# Allegro board isl9237eval1Zb.brd
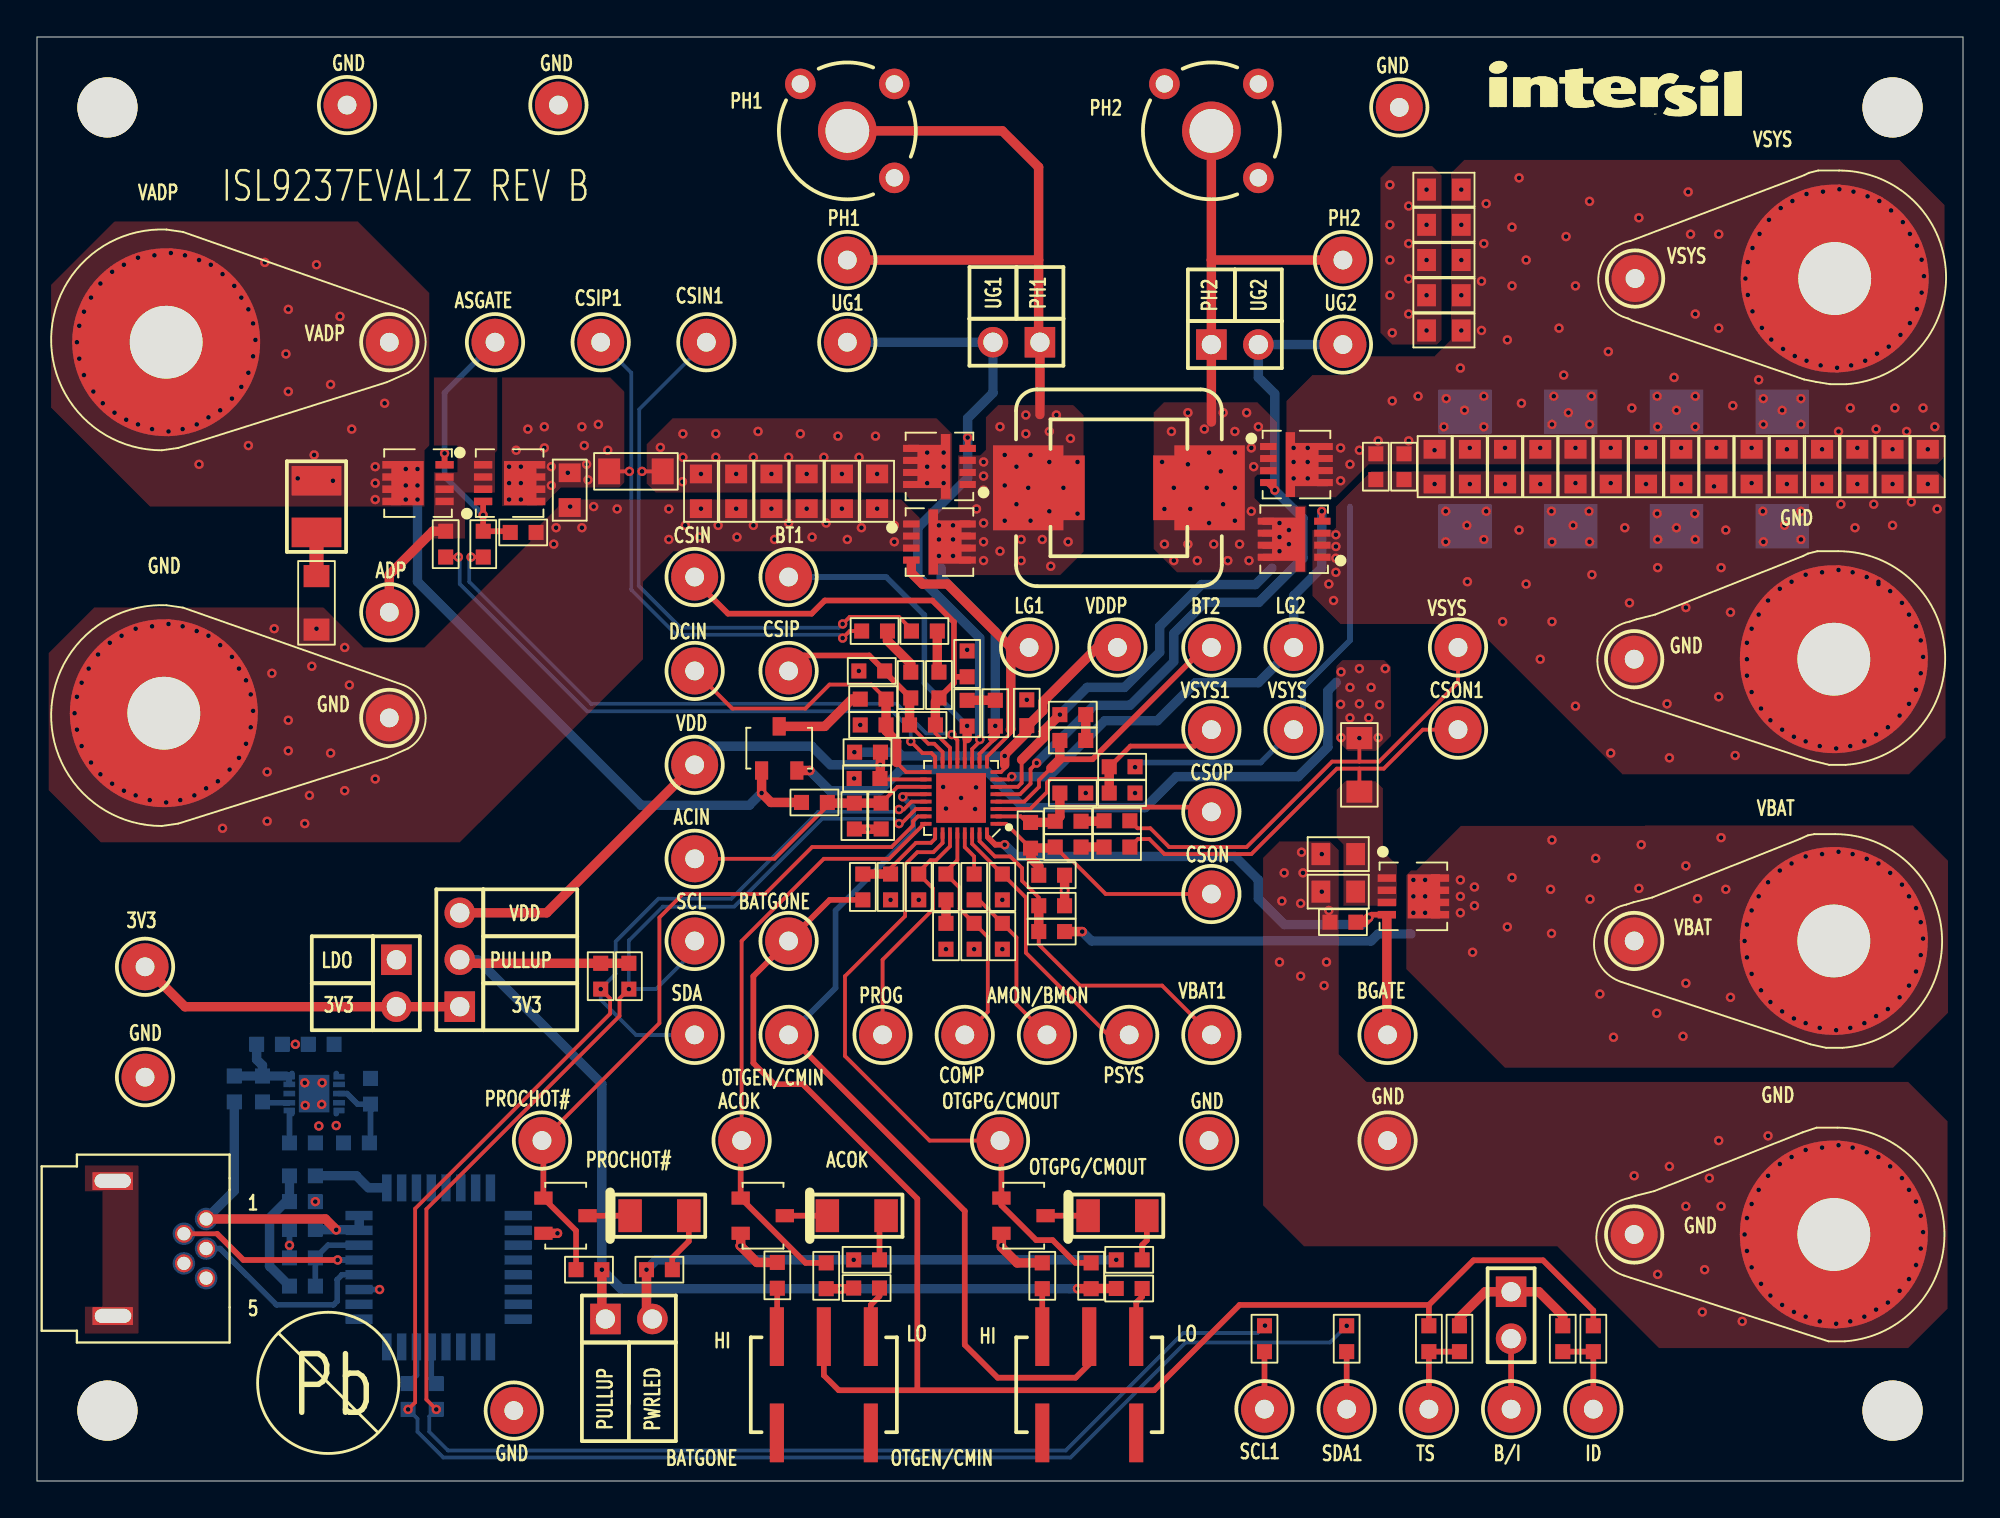
[diagram p0: board, top side]
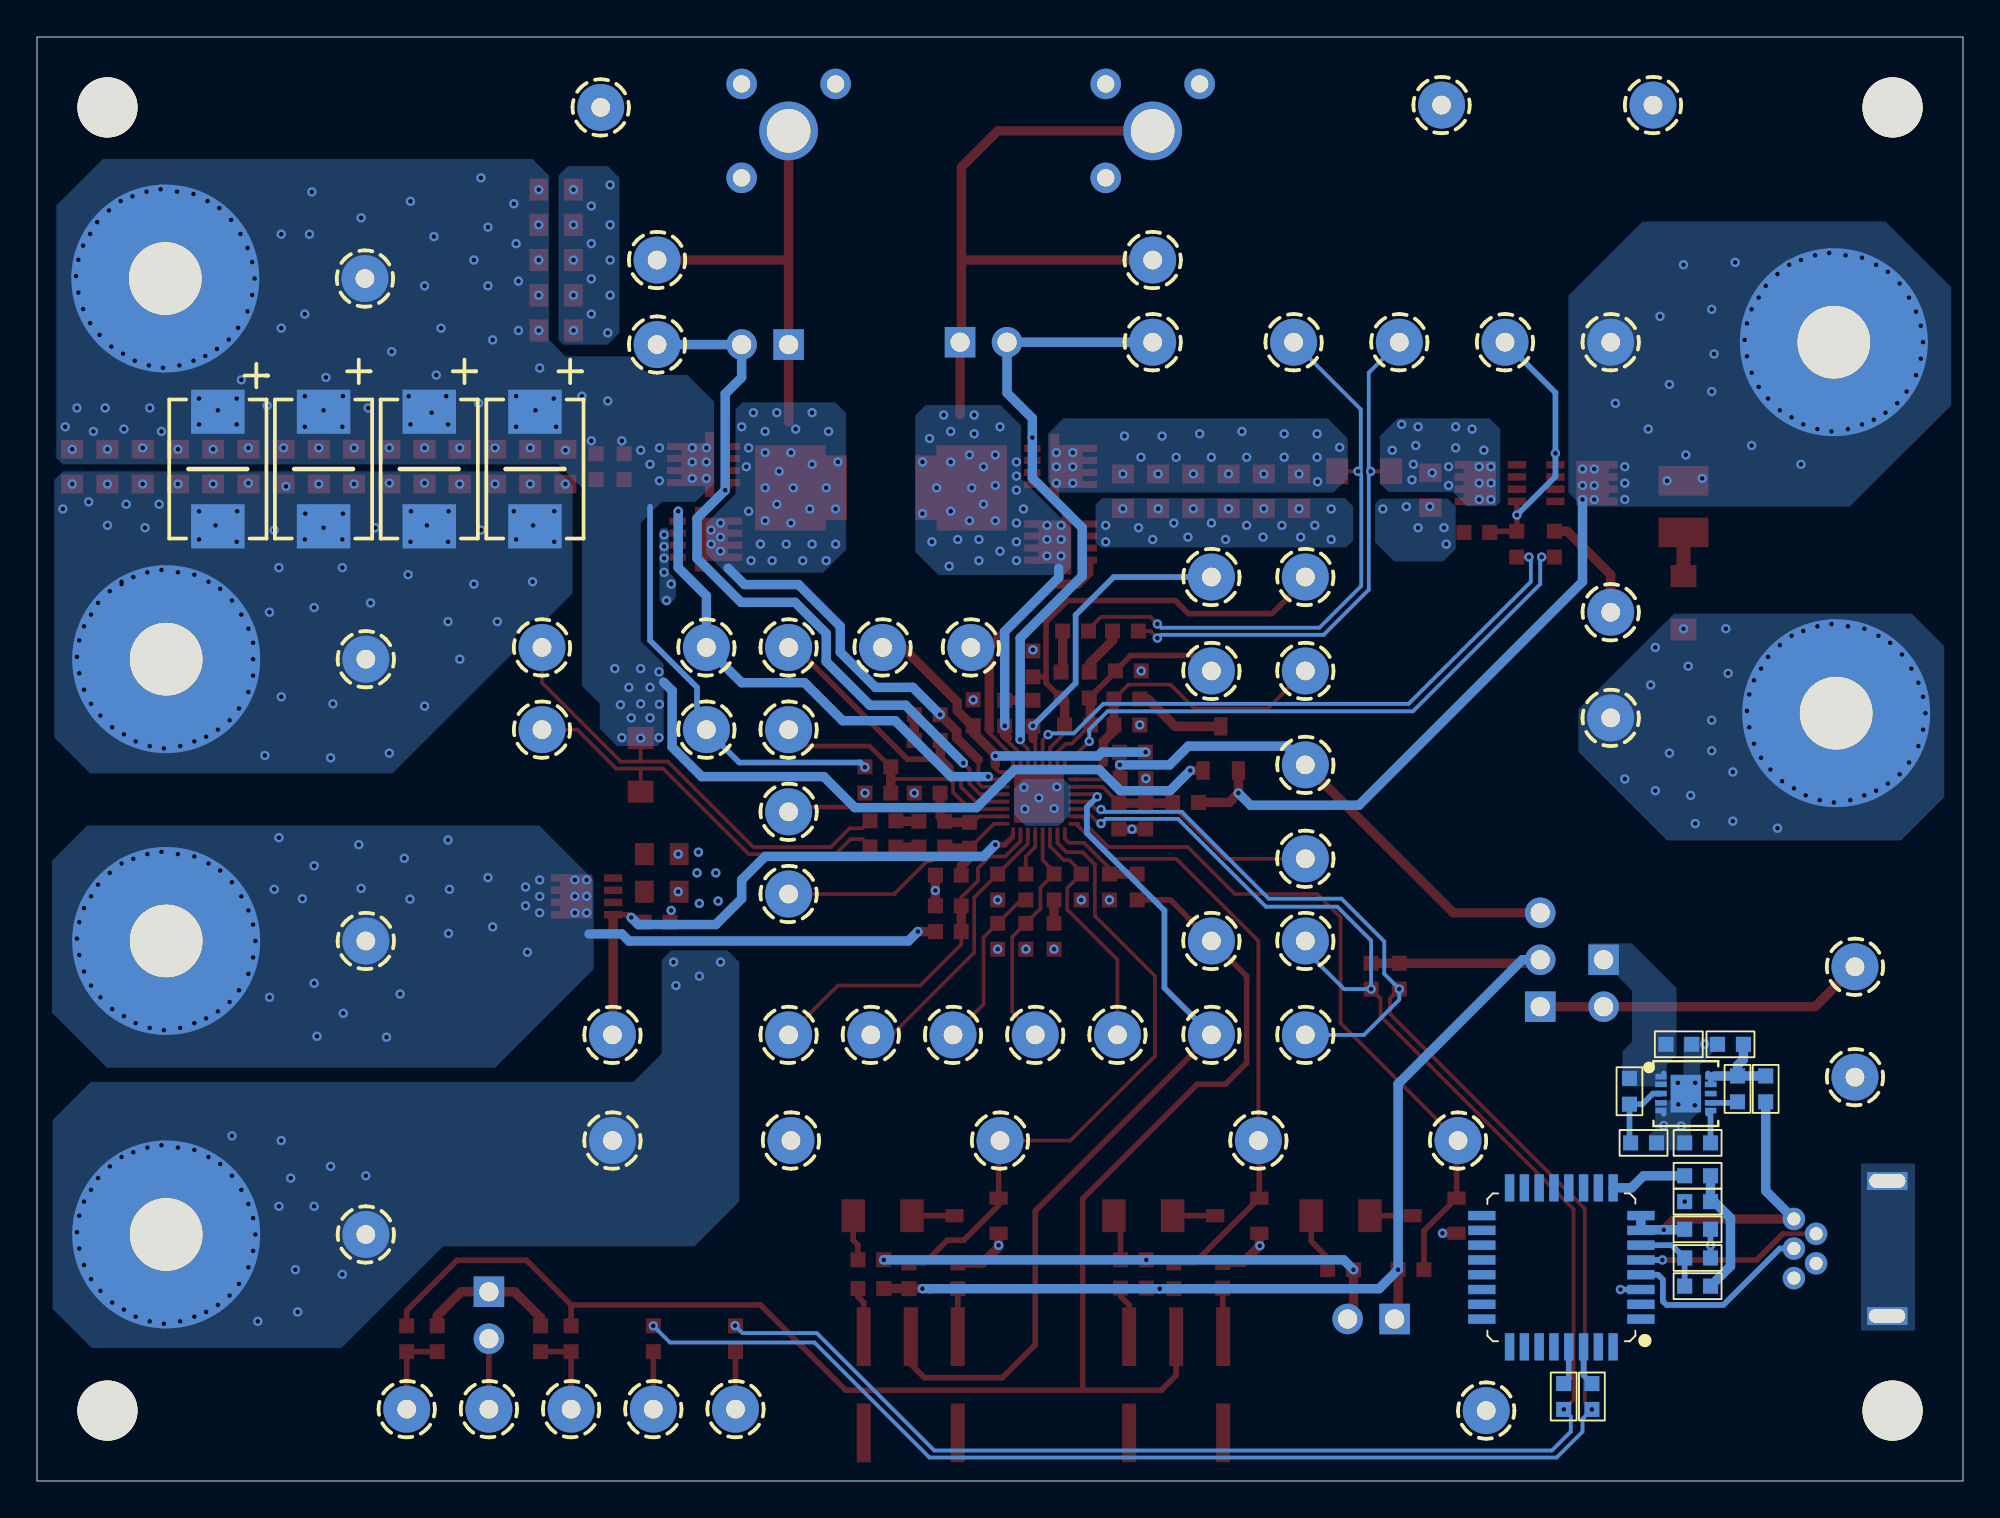
[diagram p1: board, bottom side, seen from below]

Outline 104.14 x 78.1 mm; copper layers: TOP, L2, L3, BOTTOM. Coordinates in mm from the lower left corner of the outline.
Outline path: 0,78.1 0,0 104.14,0 104.14,78.1 0,78.1 ; 3.44,15.88 arc(3.13,16.25) 3.46,16.59 4.72,16.59 arc(5.05,16.2) 4.64,15.88 3.44,15.88 ; 3.46,8.58 arc(3.15,8.94) 3.49,9.29 4.75,9.29 arc(5.08,8.89) 4.67,8.58 3.46,8.58

## Design rules (mm)
nets with their own width: min track width 0.152; nets DCIN VBAT VSYS

## Placement (name value [footprint] x y rotation side)
C1  NC  [CAP_SANYO_D2]  94.36 54.74 270 bottom
C2  NC  [CAP_SANYO_D2]  88.65 54.74 270 bottom
C3  NC  [CAP_SANYO_D2]  82.93 54.74 270 bottom
C4  NC  [CAP_SANYO_D2]  77.22 54.74 270 bottom
C5  1uF  [SM0603_DELTA]  72.39 54.86 90 top
C6  1uF  [SM0603_DELTA]  73.91 54.86 90 top
C7  10uF  [SM0805_DELTA]  75.57 54.86 90 top
C8  10uF  [SM0805_DELTA]  77.47 54.86 90 top
C9  10uF  [SM0805_DELTA]  79.38 54.86 90 top
C10  10uF  [SM0805_DELTA]  81.28 54.86 90 top
C11  10uF  [SM0805_DELTA]  83.19 54.86 90 top
C12  10uF  [SM0805_DELTA]  85.09 54.86 90 top
C13  10uF  [SM0805_DELTA]  87 54.86 90 top
C14  10uF  [SM0805_DELTA]  88.9 54.86 90 top
C15  10uF  [SM0805_DELTA]  90.8 54.86 90 top
C16  10uF  [SM0805_DELTA]  92.71 54.86 90 top
C18  NC  [SM0805_DELTA]  28.8 53.59 90 top
C19  NC  [SM0805_DELTA]  45.43 53.53 90 top
C20  NC  [SM0805_DELTA]  43.52 53.53 90 top
C21  10uF  [SM0805_DELTA]  41.62 53.53 90 top
C22  10uF  [SM0805_DELTA]  39.71 53.53 90 top
C23  10uF  [SM0805_DELTA]  37.81 53.53 90 top
C24  10uF  [SM0805_DELTA]  35.9 53.53 90 top
C25  NC  [SM0603_DELTA]  26.29 51.31 180 top
C26  0.1uF  [SM0603_DELTA]  47.88 40.89 180 top
C27  2.2uF  [SM1206_DELTA]  15.11 47.5 90 top
C28  NC  [SM0603_DELTA]  45.14 43.81 0 top
C29  NC  [SM0603_DELTA]  50.29 44.2 270 top
C30  0.22uF  [SM0603_DELTA]  50.29 41.53 90 top
C31  1uF  [SM0603_DELTA]  45.21 40.89 0 top
C32  1uF  [SM0603_DELTA]  53.52 41.55 270 top
C33  1uF  [SM0603_DELTA]  44.88 38 0 top
C34  NC  [SM0603_DELTA]  56.01 37.21 180 top
C35  NC  [SM0603_DELTA]  54.86 32.77 180 top
C36  0.22uF  [SM0603_DELTA]  56.01 40.06 180 top
C37  0.1uF  [SM0603_DELTA]  53.72 34.92 90 top
C38  0.1uF  [SM0603_DELTA]  45.64 35.97 90 top
C39  NC  [SM0603_DELTA]  58.67 37.21 180 top
C40  10uF  [SM0805_DELTA]  70.36 33.91 0 top
C41  10uF  [SM0805_DELTA]  70.36 31.88 0 top
C42  NC  [SM0603_DELTA]  70.61 30.23 0 top
C43  10pF  [SM0603_DELTA]  46.15 32.13 90 top
C44  NC  [SM0603_DELTA]  54.86 31.12 180 top
C45  1000pF  [SM0603_DELTA]  52.2 29.46 90 top
C46  82nF  [SM0603_DELTA]  49.15 29.46 90 top
C81  1uF  [SM0603_DELTA]  12.57 23.62 180 bottom
C82  1000pF  [SM0603_DELTA]  14.35 18.29 180 bottom
C83  1uF  [SM0603_DELTA]  15.37 23.62 0 bottom
C84  0.1uF  [SM0603_DELTA]  14.35 12.07 0 bottom
C85  0.1uF  [SM0603_DELTA]  14.35 15.11 180 bottom
C86  0.1uF  [SM0603_DELTA]  14.35 13.61 0 bottom
C87  560pF  [SM0603_DELTA]  50.67 29.46 90 top
C88  10uF  [SM0805_DELTA]  94.61 54.86 90 top
C89  10uF  [SM0805_DELTA]  96.52 54.86 90 top
C90  10uF  [SM0805_DELTA]  98.42 54.86 90 top
C91  10uF  [SM0805_DELTA]  100.33 54.86 90 top
C92  10uF  [SM0805_DELTA]  102.23 54.86 90 top
C93  10uF  [SM0805_DELTA]  76.07 62.23 0 top
C94  10uF  [SM0805_DELTA]  76.07 64.13 0 top
C95  10uF  [SM0805_DELTA]  76.07 66.04 0 top
C96  10uF  [SM0805_DELTA]  76.07 67.94 0 top
C97  10uF  [SM0805_DELTA]  76.07 69.85 0 top
D1  BAT54C  [SOT23]  40.13 39.62 0 top
J1  Banana_J  [111-07XX-001]  6.98 61.59 180 top
J2  Banana_J  [111-07XX-001]  6.86 41.53 180 top
J3  Banana_J  [111-07XX-001]  97.2 65.04 0 top
J4  Banana_J  [111-07XX-001]  97.16 44.45 0 top
J5  Banana_J  [111-07XX-001]  97.16 29.21 0 top
J6  Banana_J  [111-07XX-001]  97.16 13.34 270 top
J10  USB_MOL54819_0511  [MOL54819_0511]  9.14 12.57 0 top
JP1  conn_2p  [CONN2]  63.5 61.47 0 top
JP2  conn_2p  [CONN2]  54.23 61.59 180 top
JP3  conn_2p  [CONN2]  30.73 8.76 0 top
JP4  conn_2p  [CONN2]  19.43 28.19 270 top
JP5  conn_2p  [CONN2]  79.71 10.24 270 top
JP6  Jumper_3p  [CONN-1X3]  22.86 25.65 180 top
L1  10x10  [ETQP4LXXXWFC]  58.5 53.72 180 top
L2  2uH  [IND_PIMB061H]  58.5 53.72 0 top
LED1  597_3311_402  [SM1206]  33.66 14.35 0 top
LED2  597_3311_402  [SM1206]  44.32 14.35 0 top
LED3  597_3311_402  [SM1206]  58.42 14.35 0 top
NOREF  -  []  15.75 5.31 0 top
NOREF#2  -  [unnamed#2]  3.81 74.29 0 top
NOREF#3  -  [unnamed#2]  100.33 74.29 270 top
NOREF#4  -  []  76.87 72.84 0 top
NOREF#5  -  [unnamed#2]  3.81 3.81 0 top
NOREF#6  -  []  0 78.1 0 top
NOREF#7  -  []  104.14 0 90 top
NOREF#8  -  []  -83.19 -84.46 0 top
NOREF#9  -  [unnamed#2]  100.33 3.81 0 top
Q1  AON7410  [PWRPAK_SINGLE_1212_8]  48.8 54.88 180 top
Q2  AON7410  [PWRPAK_SINGLE_1212_8]  48.8 50.79 0 top
Q3  AON7410  [PWRPAK_SINGLE_1212_8]  67.97 50.94 180 top
Q4  AON7410  [PWRPAK_SINGLE_1212_8]  68.1 54.98 0 top
Q5  Si7655DN  [PWRPAK_SINGLE_1212-8]  74.42 31.62 0 top
Q6  TPCC8131  [PWRPAK_SINGLE_1212-8]  20.6 53.97 180 top
Q7  TPCC8131  [PWRPAK_SINGLE_1212-8]  25.56 53.97 0 top
Q8  2N7002  [SOT23]  39.24 14.35 270 top
Q9  2N7002  [SOT23]  28.57 14.35 270 top
Q10  2N7002  [SOT23]  53.34 14.35 270 top
R1  1  [SM0603_DELTA]  47.24 43.05 270 top
R2  1  [SM0603_DELTA]  48.77 43.05 270 top
R3  2.2  [SM1210]  15.11 52.7 270 top
R4  0  [SM0603_DELTA]  22.1 50.67 270 top
R5  0  [SM0603_DELTA]  24.13 50.67 270 top
R6  0  [SM0603_DELTA]  51.82 41.53 90 top
R7  1  [SM0603_DELTA]  45.21 42.29 180 top
R8  4.7  [SM0603_DELTA]  44.91 39.42 180 top
R9  402K  [SM0603_DELTA]  42.04 36.7 180 top
R10  1  [SM0603_DELTA]  55.75 35.69 180 top
R11  0  [SM0603_DELTA]  56.01 41.45 0 top
R12  0  [SM0603_DELTA]  58.67 38.63 180 top
R13  107K  [SM0603_DELTA]  44.2 35.97 90 top
R14  1  [SM0603_DELTA]  55.75 34.29 180 top
R15  10K  [SM0603_DELTA]  30.48 27.3 90 top
R16  10K  [SM0603_DELTA]  32 27.3 90 top
R21  100K  [SM0603_DELTA]  44.65 32.13 90 top
R22  0  [SM0603_DELTA]  54.86 29.72 180 top
R23  115K  [SM0603_DELTA]  47.68 32.13 270 top
R24  0  [SM0603_DELTA]  50.67 32.13 270 top
R25  6.04K  [SM0603_DELTA]  52.2 32.13 270 top
R27  2K  [SM0603_DELTA]  49.15 32.13 270 top
R28  100K  [SM0603_DELTA]  44.86 10.44 0 top
R31  100K  [SM0603_DELTA]  59.05 10.41 0 top
R32  220  [SM0603_DELTA]  33.66 11.43 180 top
R33  220  [SM0603_DELTA]  44.86 11.96 180 top
R34  220  [SM0603_DELTA]  59.05 11.96 180 top
R35  NC  [SM0603_DELTA]  84.15 7.7 270 top
R36  10K  [SM0603_DELTA]  42.67 11.1 90 top
R37  NC  [SM0603_DELTA]  75.26 7.7 270 top
R38  10K  [SM0603_DELTA]  29.85 11.43 180 top
R39  10K  [SM0603_DELTA]  57 11.1 90 top
R40  0  [SM0603_DELTA]  70.82 7.7 270 top
R41  0  [SM0603_DELTA]  66.37 7.7 270 top
R42  0  [SM0603_DELTA]  76.91 7.7 270 top
R43  0  [SM0603_DELTA]  82.5 7.7 270 top
R44  100K  [SM0603_DELTA]  40.03 11.13 90 top
R45  100K  [SM0603_DELTA]  54.36 11.1 90 top
R81  10k  [SM0603_DELTA]  12.19 21.21 270 bottom
R82  5.62K  [SM0603_DELTA]  18.03 21.08 90 bottom
R83  1K  [SM0603_DELTA]  17.27 18.29 0 bottom
R84  0  [SM0603_DELTA]  10.67 21.21 270 bottom
R85  0  [SM0603_DELTA]  20.07 4.57 90 bottom
R86  0  [SM0603_DELTA]  21.59 4.57 90 bottom
R87  1K  [SM0603_DELTA]  14.35 10.54 180 bottom
R88  1K  [SM0603_DELTA]  14.35 16.51 0 bottom
R89  0  [SM0603_DELTA]  45.29 45.97 0 top
R90  0  [SM0603_DELTA]  47.98 45.97 0 top
R91  0  [SM0603_DELTA]  58.39 35.71 180 top
R92  0  [SM0603_DELTA]  58.39 34.29 180 top
RS1  0.02  [SM1206_DELTA]  32.38 54.61 180 top
RS2  0.01  [SM1206_DELTA]  71.5 38.73 90 top
SW1  GT11MSCKE  [GT11SC]  42.54 5.21 180 top
SW2  GT11MSCKE  [GT11SC]  56.9 5.21 180 top
TP1  KEYSTONE-PN-500X-100P40H  [MTP500X]  19.05 61.59 0 top
TP2  KEYSTONE-PN-500X-100P40H  [MTP500X]  19.05 41.27 0 top
TP3  KEYSTONE-PN-500X-100P40H  [MTP500X]  30.48 61.59 270 top
TP4  KEYSTONE-PN-500X-100P40H  [MTP500X]  86.41 65.04 0 top
TP5  KEYSTONE-PN-500X-100P40H  [MTP500X]  86.36 44.45 0 top
TP6  KEYSTONE-PN-500X-100P40H  [MTP500X]  36.2 61.59 270 top
TP7  KEYSTONE-PN-500X-100P40H  [MTP500X]  19.05 46.99 0 top
TP8  KEYSTONE-PN-500X-100P40H  [MTP500X]  24.77 61.59 0 top
TP9  KEYSTONE-PN-500X-100P40H  [MTP500X]  43.81 61.59 0 top
TP10  KEYSTONE-PN-500X-100P40H  [MTP500X]  70.61 61.47 0 top
TP11  KEYSTONE-PN-500X-100P40H  [MTP500X]  35.56 48.9 90 top
TP12  KEYSTONE-PN-500X-100P40H  [MTP500X]  40.64 43.81 90 top
TP13  Probe Socket  [TEK131-4353-00]  63.5 73.03 0 top
TP14  Probe Socket  [TEK131-4353-00]  43.81 73.03 0 top
TP15  KEYSTONE-PN-500X-100P40H  [MTP500X]  40.64 48.9 0 top
TP16  KEYSTONE-PN-500X-100P40H  [MTP500X]  53.64 45.09 0 top
TP17  KEYSTONE-PN-500X-100P40H  [MTP500X]  35.56 43.81 0 top
TP18  KEYSTONE-PN-500X-100P40H  [MTP500X]  67.94 45.09 0 top
TP19  KEYSTONE-PN-500X-100P40H  [MTP500X]  58.42 45.09 0 top
TP20  KEYSTONE-PN-500X-100P40H  [MTP500X]  35.56 38.73 0 top
TP21  KEYSTONE-PN-500X-100P40H  [MTP500X]  35.56 33.66 0 top
TP22  KEYSTONE-PN-500X-100P40H  [MTP500X]  63.5 45.09 0 top
TP23  KEYSTONE-PN-500X-100P40H  [MTP500X]  76.83 45.09 0 top
TP24  KEYSTONE-PN-500X-100P40H  [MTP500X]  35.56 24.13 0 top
TP25  KEYSTONE-PN-500X-100P40H  [MTP500X]  63.5 40.64 0 top
TP26  KEYSTONE-PN-500X-100P40H  [MTP500X]  35.56 29.21 0 top
TP27  KEYSTONE-PN-500X-100P40H  [MTP500X]  63.5 36.2 0 top
TP28  KEYSTONE-PN-500X-100P40H  [MTP500X]  86.36 29.21 0 top
TP29  KEYSTONE-PN-500X-100P40H  [MTP500X]  76.83 40.64 0 top
TP30  KEYSTONE-PN-500X-100P40H  [MTP500X]  63.5 31.75 0 top
TP31  KEYSTONE-PN-500X-100P40H  [MTP500X]  86.36 13.34 0 top
TP32  KEYSTONE-PN-500X-100P40H  [MTP500X]  73.02 24.13 0 top
TP33  KEYSTONE-PN-500X-100P40H  [MTP500X]  45.72 24.13 0 top
TP34  KEYSTONE-PN-500X-100P40H  [MTP500X]  59.05 24.13 0 top
TP35  KEYSTONE-PN-500X-100P40H  [MTP500X]  63.5 24.13 0 top
TP36  KEYSTONE-PN-500X-100P40H  [MTP500X]  54.61 24.13 0 top
TP37  KEYSTONE-PN-500X-100P40H  [MTP500X]  50.16 24.13 0 top
TP38  KEYSTONE-PN-500X-100P40H  [MTP500X]  84.15 3.89 180 top
TP39  KEYSTONE-PN-500X-100P40H  [MTP500X]  79.71 3.89 180 top
TP40  KEYSTONE-PN-500X-100P40H  [MTP500X]  75.26 3.89 180 top
TP41  KEYSTONE-PN-500X-100P40H  [MTP500X]  70.82 3.89 180 top
TP42  KEYSTONE-PN-500X-100P40H  [MTP500X]  66.37 3.89 180 top
TP43  KEYSTONE-PN-500X-100P40H  [MTP500X]  40.64 29.21 0 top
TP44  KEYSTONE-PN-500X-100P40H  [MTP500X]  40.64 24.13 0 top
TP45  KEYSTONE-PN-500X-100P40H  [MTP500X]  38.1 18.41 0 top
TP46  KEYSTONE-PN-500X-100P40H  [MTP500X]  27.3 18.41 0 top
TP47  KEYSTONE-PN-500X-100P40H  [MTP500X]  52.07 18.41 0 top
TP48  KEYSTONE-PN-500X-100P40H  [MTP500X]  28.19 74.42 0 top
TP49  KEYSTONE-PN-500X-100P40H  [MTP500X]  16.76 74.42 0 top
TP50  KEYSTONE-PN-500X-100P40H  [MTP500X]  5.84 21.84 0 top
TP51  KEYSTONE-PN-500X-100P40H  [MTP500X]  73.02 18.41 90 top
TP52  KEYSTONE-PN-500X-100P40H  [MTP500X]  63.37 18.41 90 top
TP53  KEYSTONE-PN-500X-100P40H  [MTP500X]  5.84 27.81 0 top
TP54  KEYSTONE-PN-500X-100P40H  [MTP500X]  25.78 3.81 0 top
TP55  KEYSTONE-PN-500X-100P40H  [MTP500X]  73.66 74.29 0 top
TP56  KEYSTONE-PN-500X-100P40H  [MTP500X]  43.81 66.04 0 top
TP57  KEYSTONE-PN-500X-100P40H  [MTP500X]  70.61 66.04 0 top
TP58  KEYSTONE-PN-500X-100P40H  [MTP500X]  67.94 40.64 0 top
U1  ISL9237  [QFN32_157X157_157_EP]  49.96 36.95 180 top
U2  C8051F320  [LQFP32_275X275_315]  21.72 11.56 90 bottom
U3  ISL80101IRAJZ  [DFN10_118X118_197_EP]  14.99 20.96 180 bottom

## Library data of the parts
C1-C4 = SANYO-POSCAP-D2: User Part Number: CAP_SANYO_D2
C5 C6 C25 C26 C28-C37 C39 C42-C46 C81-C87 R32-R34 = 0603: User Part Number: SM0603_DELTA
C7-C16 C18-C24 C40 C41 C88-C97 = 0603: User Part Number: SM0805_DELTA
C27 = 0603: User Part Number: SM1206_DELTA
C38 R1 R2 R4-R16 R21-R25 R27 R28 R31 R35-R45 R84-R86 R89-R92 = 0201: User Part Number: SM0603_DELTA
D1 = BAT54C/SOT: User Part Number: SOT23
J1-J6 = Banana_J: User Part Number: 111-07XX-001
J10 = USB_MOL54819_0511: User Part Number: MOL54819_0511
JP1-JP5 = conn_2p: User Part Number: CONN2
JP6 = Jumper_3p: User Part Number: CONN-1X3
L1 = PANASONIC-ETQP4L: User Part Number: ETQP4LXXXWFC
L2 = COILCRAFT-CHIP-IND-0805: User Part Number: IND_PIMB061H
LED1-LED3 = LN1461C: User Part Number: SM1206
Q1-Q4 = AON7410_0: User Part Number: Si7655DN
Q5 = Si7655DN_4
Q6 Q7 = Si7655DN_4: User Part Number: Si7655DN
Q8-Q10 = 2N7002: User Part Number: SOT23
R3 = 0201: User Part Number: SM1210
R81-R83 R87 R88 = 0402: User Part Number: SM0603_DELTA
RS1 RS2 = 0805: User Part Number: SM1206_DELTA
SW1 SW2 = G3T12AP_9: User Part Number: GT11SC
TP1-TP12 TP15-TP58 = KEYSTONE-PN-500X-100P40H: User Part Number: MTP500X
TP13 TP14 = Probe Socket_4P: User Part Number: TEK131-4353-00
U1 = ISL9237_1: User Part Number: QFN32_157x157_157_EP
U2 = ISL65006_1: User Part Number: LQFP32_275X275_315
U3 = ISL80101_DFN: User Part Number: U3

## Footprints (pads in the part's own frame, mm; a bottom-side part is the same pattern mirrored in y, then rotated)
111-07XX-001
  round 10.16 hole 3.937: 1(0,0)
CAP_SANYO_D2
  rect 2.388x2.896 smd: 1(-3.099,0) 2(3.099,0)
CONN2
  rect 1.651x1.651 hole 1.041: 1(0,0)
  round 1.651 hole 1.041: 2(2.54,0)
CONN-1X3
  rect 1.651x1.651 hole 1.041: 1(0,0)
  round 1.651 hole 1.041: 2(0,-2.54) 3(0,-5.08)
DFN10_118X118_197_EP
  custom 0.604x0.477 smd: 1(-1.346,1.001) 5(-1.346,-1.001) 6(1.346,-1.001) 10(1.346,1.001)
  rect 0.635x0.305 smd: 2(-1.346,0.5) 3(-1.346,0) 4(-1.346,-0.5) 7(1.346,-0.5) 8(1.346,0) 9(1.346,0.5)
  rect 1.651x2.032 smd: 11(0,0)
ETQP4LXXXWFC
  rect 3.81x4.597 smd: 1(-4.902,0) 2(4.902,0)
GT11SC
  rect 0.762x3.175 smd: 1(2.54,-2.603) 2(0,-2.603) 3(-2.54,-2.603) 4(2.54,2.603) 6(-2.54,2.603)
IND_PIMB061H
  rect 2.35x3.5 smd: 1(-3.025,0) 2(3.025,0)
LQFP32_275X275_315
  rect 0.508x1.473 smd: 1(-2.8,-4.3) 2(-2,-4.3) 3(-1.2,-4.3) 4(-0.4,-4.3) 5(0.4,-4.3) 6(1.2,-4.3) 7(2,-4.3) 8(2.8,-4.3) 17(2.8,4.3) 18(2,4.3) 19(1.2,4.3) 20(0.4,4.3) 21(-0.4,4.3) 22(-1.2,4.3) 23(-2,4.3) 24(-2.8,4.3)
  rect 1.473x0.508 smd: 9(4.3,-2.8) 10(4.3,-2) 11(4.3,-1.2) 12(4.3,-0.4) 13(4.3,0.4) 14(4.3,1.2) 15(4.3,2) 16(4.3,2.8) 25(-4.3,2.8) 26(-4.3,2) 27(-4.3,1.2) 28(-4.3,0.4) 29(-4.3,-0.4) 30(-4.3,-1.2) 31(-4.3,-2) 32(-4.3,-2.8)
MOL54819_0511
  round 0.965 hole 0.711: 1(0,1.6) 2(-1.2,0.8) 3(0,0) 4(-1.2,-0.8) 5(0,-1.6)
  rect 2.184x0.965 hole 1.93x0.711: 6(-5.05,-3.65) 7(-5.05,3.65)
MTP500X
  round 2.54 hole 1.016: 1(0,0)
PWRPAK_SINGLE_1212-8
  rect 0.991x0.406 smd: 1(-1.435,0.991) 2(-1.435,0.33) 3(-1.435,-0.33) 4(-1.435,-0.991) 5(1.435,-0.991) 6(1.435,-0.33) 7(1.435,0.33) 8(1.435,0.991)
PWRPAK_SINGLE_1212_8
  rect 0.889x0.381 smd: 1(-1.524,0.975) 2(-1.524,0.325) 3(-1.524,-0.325) 4(-1.524,-0.975) 5(1.524,-0.975) 6(1.524,-0.325) 7(1.524,0.325) 8(1.524,0.975)
QFN32_157X157_157_EP
  rect 0.61x0.203 smd: 1(-1.9,1.4) 2(-1.9,1) 3(-1.9,0.6) 4(-1.9,0.2) 5(-1.9,-0.2) 6(-1.9,-0.6) 7(-1.9,-1) 8(-1.9,-1.4) 17(1.9,-1.4) 18(1.9,-1) 19(1.9,-0.6) 20(1.9,-0.2) 21(1.9,0.2) 22(1.9,0.6) 23(1.9,1) 24(1.9,1.4)
  rect 0.203x0.61 smd: 9(-1.4,-1.9) 10(-1,-1.9) 11(-0.6,-1.9) 12(-0.2,-1.9) 13(0.2,-1.9) 14(0.6,-1.9) 15(1,-1.9) 16(1.4,-1.9) 25(1.4,1.9) 26(1,1.9) 27(0.6,1.9) 28(0.2,1.9) 29(-0.2,1.9) 30(-0.6,1.9) 31(-1,1.9) 32(-1.4,1.9)
  rect 2.692x2.692 smd: 33(0,0)
SM0603_DELTA
  rect 0.813x0.813 smd: 1(-0.699,0) 2(0.699,0)
SM0805_DELTA
  rect 1.016x1.194 smd: 1(-0.94,0) 2(0.94,0)
SM1206
  rect 1.27x1.778 smd: 1(-1.587,0) 2(1.587,0)
SM1206_DELTA
  rect 1.194x1.397 smd: 1(-1.448,0) 2(1.448,0)
SM1210
  rect 1.6x2.692 smd: 1(-1.397,0) 2(1.397,0)
SOT23
  rect 0.711x0.991 smd: 1(-0.953,-1.194) 2(0.953,-1.194) 3(0,1.194)
TEK131-4353-00
  round 3.175 hole 2.362: 1(0,0)
  round 1.651 hole 0.94: 2(2.54,-2.54) 3(2.54,2.54) 4(-2.54,2.54)
unnamed#2
  round 3.251 hole 3.251 unplated: (0,0)

## Nets
3V3: JP4.2 JP6.1 TP53.1
GND: C1.2(N) C2.2(N) C3.2(N) C4.2(N) C5.1 C6.1 C7.1 C8.1 C9.1 C10.1 C11.1 C12.1 C13.1 C14.1 C15.1 C16.1 C18.1 C19.1 C20.1 C21.1 C22.1 C23.1 C24.1 C25.1 C27.1 C28.1 C29.1 C31.1 C32.1 C33.1 C34.1 C35.1 C38.1 C39.1 C40.1 C41.1 C42.1 C43.1 C44.1 C45.1 C46.1 C81.1 C82.1 C83.1 C84.1 C85.1 C86.1 C87.1 C88.1 C89.1 C90.1 C91.1 C92.1 C93.1 C94.1 C95.1 C96.1 C97.1 J2.1 J4.1 J6.1 J10.4 J10.5 J10.6 J10.7 JP5.1 Q2.1(S#1) Q2.2(S#2) Q2.3(S#3) Q3.1(S#1) Q3.2(S#2) Q3.3(S#3) Q8.2(SOURCE) Q9.2(SOURCE) Q10.2(SOURCE) R13.1 R23.2 R25.2 R42.1 R43.1 R44.2 R45.2 R83.1 TP2.1 TP5.1 TP13.2(GND2) TP13.3(GND3) TP13.4(GND4) TP14.2(GND2) TP14.3(GND3) TP14.4(GND4) TP31.1 TP48.1 TP49.1 TP50.1 TP51.1 TP52.1 TP54.1 TP55.1 U1.33(PGND) U2.3(GND) U3.4(PG) U3.5(GND) U3.11(EP)
VBAT: J5.1 Q5.5(D#5) Q5.6(D#6) Q5.7(D#7) Q5.8(D#8) R22.1 TP28.1
VBAT1: C44.2 R22.2 TP35.1 U1.31(VBAT)
VDD: C33.2 JP6.3 R8.1 TP20.1 U1.18(VDD)
VDDP: C32.2 R8.2 TP19.1 U1.8(VDDP)
ACIN: C38.2 R9.1 R13.2 TP21.1 U1.19(ACIN)
ACOK: Q8.1(GATE) R36.2 TP45.1 U1.24(ACOK)
ADP: Q6.1(S#1) Q6.2(S#2) Q6.3(S#3) Q7.1(S#1) Q7.2(S#2) Q7.3(S#3) R4.1 TP7.1
AMON/BMON: C45.2 R24.2 TP36.1
ASGATE: R5.2 U1.13(ASGATE)
B/I: JP5.2 TP39.1
BATGONE: R21.1 R35.1 R37.1 SW1.2 TP43.1
BGATE: C42.2 Q5.4(G) TP32.1 U1.32(BGATE)
BT1: C30.1 TP15.1 U1.12(BOOT1)
BT2: C36.2 TP22.1 U1.4(BOOT2)
COMP: C87.2 R27.1 TP37.1 U1.28(COMP)
CSIN: C26.1 C29.2 R2.2 TP11.1 U1.14(CSIN)
CSIN1: C19.2 C20.2 C21.2 C22.2 C23.2 C24.2 Q1.5(D#5) Q1.6(D#6) Q1.7(D#7) Q1.8(D#8) R90.1 RS1.1 TP6.1
CSIP: C26.2 C28.2 R1.2 TP12.1 U1.15(CSIP)
CSIP1: C18.2 Q7.5(D#5) Q7.6(D#6) Q7.7(D#7) Q7.8(D#8) R89.1 RS1.2 TP3.1
CSON: C35.2 C37.1 R14.2 TP30.1 U1.1(CSON)
CSON1: C40.2 C41.2 Q5.1(S#1) Q5.2(S#2) Q5.3(S#3) R92.1 RS2.1 TP29.1
CSOP: C34.2 C37.2 R10.2 TP27.1 U1.2(CSOP)
DCIN: C31.2 R7.1 TP17.1 U1.17(DCIN)
ID: R35.2 R43.2 TP38.1
LG1: Q2.4(G) TP16.1 U1.9(LGATE1)
LG2: Q3.4(G) TP18.1 U1.7(LGATE2)
OTGEN/CMIN: SW2.2 TP44.1 U1.20(OTGEN/CMIN)
OTGPG/CMOUT: Q10.1(GATE) R39.2 TP47.1 U1.26(OTGPG/CMOUT)
P1.4: U2.22(P1.4)
P1.5: U2.21(P1.5)
P1.6: U2.20(P1.6)
P1.7: U2.19(P1.7)
P2.0: U2.18(P2.0)
P2.1: U2.17(P2.1)
P2.2: U2.16(P2.2)
P2.3: U2.15(P2.3)
P2.4: U2.14(P2.4)
P2.5: U2.13(P2.5)
P2.6: U2.12(P2.6)
P2.7: U2.11(P2.7)
P3.0/C2D: U2.10(P3.0/C2D)
PH1: JP2.1 L1.2 L2.1 Q1.1(S#1) Q1.2(S#2) Q1.3(S#3) Q2.5(D#5) Q2.6(D#6) Q2.7(D#7) Q2.8(D#8) R6.1 TP14.1(SIGNAL) TP56.1 U1.10(PHASE1)
PH2: JP1.1 L1.1 L2.2 Q3.5(D#5) Q3.6(D#6) Q3.7(D#7) Q3.8(D#8) Q4.1(S#1) Q4.2(S#2) Q4.3(S#3) R11.1 TP13.1(SIGNAL) TP57.1 U1.6(PHASE2)
PROCHOT#: Q9.1(GATE) R38.2 TP46.1 U1.23(PROCHOT#)
PROG: R23.1 TP33.1 U1.27(PROG)
PSYS: R25.1 TP34.1 U1.30(PSYS)
PULLUP: JP3.1 JP6.2 R15.2 R16.2 R28.1 R31.1 R36.1 R38.1 R39.1
PWRLED: JP3.2 R32.2 R33.2 R34.2
SCL: R16.1 R41.1 R86.1 TP26.1 U1.22(SCL)
SCL1: R41.2 TP42.1
SDA: R15.1 R40.1 R85.1 TP24.1 U1.21(SDA)
SDA1: R40.2 TP41.1
TS: R37.2 R42.2 TP40.1
UG1: JP2.2 Q1.4(G) TP9.1 U1.11(UGATE1)
UG2: JP1.2 Q4.4(G) TP10.1 U1.5(UGATE2)
VADP: D1.1(C1) J1.1 Q6.5(D#5) Q6.6(D#6) Q6.7(D#7) Q6.8(D#8) R3.1 R9.2 TP1.1
VSYS: C1.1(P) C2.1(P) C3.1(P) C4.1(P) C5.2 C6.2 C7.2 C8.2 C9.2 C10.2 C11.2 C12.2 C13.2 C14.2 C15.2 C16.2 C88.2 C89.2 C90.2 C91.2 C92.2 C93.2 C94.2 C95.2 C96.2 C97.2 D1.2(C2) J3.1 Q4.5(D#5) Q4.6(D#6) Q4.7(D#7) Q4.8(D#8) R12.1 R91.1 RS2.2 TP4.1 TP23.1 TP58.1
VSYS1: C39.2 R12.2 TP25.1 U1.3(VSYS)
N3388611: C85.2 R87.2 R88.1
N3403853: R86.2 U2.29(P0.5)
N3403912: R85.2 U2.30(P0.4)
N3404418: C86.2 J10.1 R84.2 U2.7(REGIN) U2.8(VBUS)
N3404574: J10.2 U2.5(D-)
N3404616: J10.3 U2.4(D+)
N3405190: C84.2 R87.1 U2.6(VDD)
N3405391: R88.2 U2.9(RST/C2CK)
N3864784: R81.2 U3.7(ENABLE)
N3864951: C82.2 U3.6(SS)
N3865034: C83.2 JP4.1 R82.2 U3.1(VOUT#1) U3.2(VOUT#2)
N3865052: R82.1 R83.2 U3.3(SENSE/ADJ)
N3866091: C81.2 R81.1 R84.1 U3.9(VIN#9) U3.10(VIN#10)
N3880625: C46.2 R27.2
N3884094: R24.1 U1.29(AMON/BMON)
N3892370: C25.2 Q6.4(G) Q7.4(G) R5.1 TP8.1
N3892442: R4.2 U1.16(ADP)
N3896354: C43.2 R21.2 U1.25(BATGONE)
N3896496: D1.3(A) R7.2
N3899462: LED3.2(ANODE) R34.1
N3902274: LED1.2(ANODE) R32.1
N3902278: LED1.1(CATHODE) Q9.3(DRAIN)
N3906567: R44.1 SW1.1
N3906607: R28.2 SW1.3
N3907387: R45.1 SW2.1
N3907453: R31.2 SW2.3
N3914358: LED2.2(ANODE) R33.1
N3914362: LED2.1(CATHODE) Q8.3(DRAIN)
N3952115: C36.1 R11.2
N3981607: C27.2 R3.2
N4021953: C30.2 R6.2
N4039122: LED3.1(CATHODE) Q10.3(DRAIN)
N4125007: R1.1 R89.2
N4125862: R10.1 R91.2
N4125866: R14.1 R92.2
N38675681: R2.1 R90.2

Pads without a net: SW1 4 6; SW2 4 6; U2 1 2 23 24 25 26 27 28 31 32; U3 8

## Via types
v1: diameter 0.508, hole 0.254, TOP to BOTTOM, 716 vias

## Routing (per net, layer and track width the routed paths; a pad name or vN(x,y) marks a point on that pad's centre or on a via; arc(x,y) is an arc through that point)
3V3: length 17.9
  TOP w0.508: JP6.1 JP4.2 8,25.65 TP53.1
GND: length 20.7
  TOP w0.152: v1(50.29,44.96) C29.1
  TOP w0.508: Q8.2 38.05,12.75 v1(38.02,12.73) 38.93,11.82 R44.2 ; C44.1 v1(55.56,31.94) C35.1 ; Q9.2 v1(28.14,13.4) ; C38.1 45.63,35.26 v1(44.93,35.26) 44.21,35.26 R13.1 ; Q10.2 v1(52.15,12.75) 52.15,12.65 53,11.8 R45.2 ; R42.1 76.91,8.84 78.31,10.24 JP5.1 81.2,10.24 82.5,8.94 R43.1
  BOTTOM w0.305: U2.3 v1(18.52,10.36) ; C84.1 v1(13.65,12.75) C86.1
  vias: v1(2.03,41.53) v1(2.16,42.42) v1(2.16,40.64) v1(2.41,43.18) v1(2.41,39.75) v1(2.79,43.94) v1(2.92,38.86) v1(3.3,44.7) v1(3.43,38.23) v1(3.94,45.34) v1(4.06,37.72) v1(4.57,45.72) v1(4.7,37.34) v1(5.33,46.1) v1(5.33,37.08) v1(6.1,36.83) v1(6.22,46.23) v1(6.98,36.7) v1(7.11,46.35) v1(7.75,36.83) v1(7.87,46.23) v1(8.51,37.08) v1(8.64,45.97) v1(9.14,37.47) v1(9.27,45.72) v1(9.78,37.85) v1(9.91,45.21) v1(10.03,35.31) v1(10.41,38.48) v1(10.54,44.58) v1(10.92,43.94) v1(10.92,39.12) v1(11.3,43.31) v1(11.3,39.88) v1(11.56,42.55) v1(11.56,40.77) v1(11.68,41.66) v1(12.45,38.35) v1(12.45,35.69) v1(12.7,43.69) v1(12.83,46.1) v1(13.59,41.15) v1(13.59,39.5) v1(13.97,23.62) v1(14.48,35.56) v1(14.48,21.54) v1(14.5,20.32) v1(14.73,37.08) v1(14.86,44.07) v1(15.11,46.1) v1(15.05,15.11) v1(15.24,19.2) v1(15.42,21.54) v1(15.39,20.37) v1(15.88,39.37) v1(16.18,19.23) v1(16.64,45.09) v1(16.64,37.34) v1(16.89,43.05) v1(18.29,37.97) v1(27.94,50.67) v1(28.07,51.56) v1(28.83,52.7) v1(29.46,51.56) v1(30.1,52.7) v1(31.37,52.58) v1(34.16,52.58) v1(34.16,50.93) v1(35.05,51.69) v1(35.81,51.05) v1(35.9,52.59) v1(36.83,51.69) v1(37.81,52.59) v1(37.85,51.05) v1(38.73,51.69) v1(39.71,52.59) v1(39.88,50.93) v1(40.64,51.82) v1(41.62,52.59) v1(41.91,51.05) v1(42.67,51.82) v1(43.52,52.59) v1(43.81,50.93) v1(44.18,38) v1(44.44,43.81) v1(44.51,40.89) v1(44.58,51.56) v1(45.43,52.59) v1(46.15,31.43) v1(46.35,51.69) v1(46.35,50.8) v1(47.68,31.43) v1(49,37.54) v1(49.15,36.37) v1(49.15,28.77) v1(49.96,36.95) v1(50.72,36.35) v1(50.67,28.77) v1(50.77,37.52) v1(52.2,31.43) v1(52.2,28.77) v1(53.52,42.25) v1(56.71,37.21) v1(59.37,37.21) v1(67.18,28.07) v1(67.31,31.37) v1(67.44,32.89) v1(68.38,34.01) v1(68.33,31.24) v1(68.33,27.3) v1(68.45,32.89) v1(69.47,33.91) v1(69.47,31.88) v1(69.6,26.8) v1(69.72,28.07) v1(69.85,48.51) v1(69.85,30.86) v1(70.1,47.62) v1(70.23,51.18) v1(70.23,50.55) v1(70.23,49.91) v1(70.23,49.15) v1(73.15,70.1) v1(73.15,67.94) v1(73.15,66.04) v1(73.15,64.13) v1(73.28,62.1) v1(74.17,68.96) v1(74.17,66.93) v1(74.17,65.02) v1(74.17,63.12) v1(75.13,69.85) v1(75.13,67.94) v1(75.13,66.04) v1(75.13,64.13) v1(75.13,62.23) v1(75.57,53.92) v1(76.17,52.45) v1(76.17,50.8) v1(77.31,51.69) v1(77.34,48.64) v1(77.47,53.92) v1(78.23,50.93) v1(78.36,52.45) v1(79.25,46.48) v1(79.38,53.92) v1(80.14,51.44) v1(80.52,48.51) v1(81.28,53.92) v1(81.28,44.45) v1(81.89,52.45) v1(81.91,50.8) v1(81.91,46.48) v1(83.06,51.69) v1(83.19,53.98) v1(83.19,41.91) v1(83.92,52.45) v1(83.95,50.8) v1(84.07,49.02) v1(85.09,53.98) v1(85.09,39.37) v1(85.85,51.56) v1(86.11,47.5) v1(86.36,16.51) v1(87,53.92) v1(87.6,52.32) v1(87.63,50.93) v1(87.63,49.4) v1(87.63,11.18) v1(88.14,42.04) v1(88.27,39.12) v1(88.27,17.02) v1(88.65,51.56) v1(88.9,53.92) v1(89.15,47.24) v1(89.15,14.86) v1(89.63,52.32) v1(89.66,50.93) v1(90.04,9.14) v1(90.17,11.43) v1(90.42,16.38) v1(90.68,53.8) v1(90.93,42.42) v1(90.93,18.41) v1(91.06,49.4) v1(91.06,14.86) v1(91.31,51.44) v1(91.57,46.99) v1(91.82,39.24) v1(92.2,8.64) v1(92.33,13.34) v1(92.46,45.34) v1(92.46,44.45) v1(92.46,43.56) v1(92.46,14.22) v1(92.46,12.45) v1(92.71,53.98) v1(92.71,46.1) v1(92.71,42.67) v1(92.71,14.99) v1(92.71,11.56) v1(93.09,46.86) v1(93.09,15.75) v1(93.22,41.78) v1(93.22,10.67) v1(93.32,52.45) v1(93.34,50.8) v1(93.6,47.62) v1(93.6,18.67) v1(93.6,16.51) v1(93.73,41.15) v1(93.73,10.03) v1(94.23,48.26) v1(94.23,17.14) v1(94.36,40.64) v1(94.36,9.53) v1(94.49,51.69) v1(94.61,53.92) v1(94.87,48.64) v1(94.87,17.53) v1(95,40.26) v1(95,9.14) v1(95.38,52.45) v1(95.38,50.93) v1(95.63,49.02) v1(95.63,40.01) v1(95.63,17.91) v1(95.63,8.89) v1(96.39,39.75) v1(96.39,8.64) v1(96.52,53.92) v1(96.52,49.15) v1(96.52,18.03) v1(97.28,39.62) v1(97.28,8.51) v1(97.41,49.28) v1(97.41,18.16) v1(97.54,52.83) v1(98.04,39.75) v1(98.04,8.64) v1(98.17,49.15) v1(98.17,18.03) v1(98.3,51.56) v1(98.42,53.92) v1(98.81,40.01) v1(98.81,8.89) v1(98.93,48.9) v1(98.93,17.78) v1(99.31,52.83) v1(99.44,40.39) v1(99.44,9.27) v1(99.57,48.64) v1(99.57,48.51) v1(99.57,17.53) v1(100.08,40.77) v1(100.08,9.65) v1(100.2,48.13) v1(100.2,17.02) v1(100.33,53.92) v1(100.33,51.69) v1(100.71,41.4) v1(100.71,10.29) v1(100.84,47.5) v1(100.84,16.38) v1(101.22,46.86) v1(101.22,42.04) v1(101.22,15.75) v1(101.22,10.92) v1(101.35,52.96) v1(101.6,46.23) v1(101.6,42.8) v1(101.6,15.11) v1(101.6,11.68) v1(101.85,45.47) v1(101.85,43.69) v1(101.85,14.35) v1(101.85,12.57) v1(101.98,44.58) v1(101.98,13.46) v1(102.23,53.92) v1(102.74,52.58)
VBAT: length 19.1
  TOP w0.508: R22.1 v1(56.52,29.72)
  BOTTOM w0.508: v1(56.52,29.72) 57.02,29.21 72.14,29.21 72.52,29.59 74.3,29.59
  vias: v1(74.42,32.51) v1(74.42,31.62) v1(74.42,30.73) v1(75.06,32.51) v1(75.06,31.62) v1(75.06,30.73) v1(76.96,32.51) v1(76.96,31.62) v1(76.96,30.73) v1(77.62,28.6) v1(77.72,32.13) v1(77.72,31.12) v1(79.5,29.97) v1(79.76,32.64) v1(81.91,34.67) v1(81.84,32) v1(81.89,29.62) v1(83.97,31.47) v1(84.28,33.68) v1(84.51,26.34) v1(85.24,24) v1(86.61,32.05) v1(86.74,34.42) v1(87.58,25.3) v1(89,24.05) v1(89.15,33.27) v1(89.15,26.92) v1(89.79,31.5) v1(91.06,34.8) v1(91.31,32) v1(91.57,26.16) v1(92.33,29.21) v1(92.46,30.1) v1(92.46,28.32) v1(92.71,30.86) v1(92.71,27.43) v1(93.09,31.62) v1(93.22,26.54) v1(93.6,32.39) v1(93.73,25.91) v1(94.23,33.02) v1(94.36,25.4) v1(94.87,33.4) v1(95,25.02) v1(95.63,33.78) v1(95.63,24.77) v1(96.39,24.51) v1(96.52,33.91) v1(97.28,24.38) v1(97.41,34.04) v1(98.04,24.51) v1(98.17,33.91) v1(98.81,24.77) v1(98.93,33.66) v1(99.44,25.15) v1(99.57,33.4) v1(100.08,25.53) v1(100.2,32.89) v1(100.71,26.16) v1(100.84,32.26) v1(101.22,31.62) v1(101.22,26.8) v1(101.6,30.99) v1(101.6,27.56) v1(101.85,30.23) v1(101.85,28.45) v1(101.98,29.34)
VBAT1: length 19.2
  TOP w0.203: TP35.1 60.83,26.8 56.39,26.8 54.17,29.02 R22.2 ; C44.2 54.17,31.56 53.26,32.46 53.26,33.15 52.63,33.78 51.79,33.78 50.96,34.61 U1.31
  TOP w0.508: C44.2 R22.2
VDD: length 30.9
  TOP w0.152: v1(45.59,38.73) 45.61,38.75
  TOP w0.203: 45.6,38.02 45.67,37.95 U1.18
  TOP w0.305: C33.2 45.6,38.02 ; 45.61,38.75 45.61,38.72 v1(45.59,38.73)
  TOP w0.508: JP6.3 27.56,30.73 TP20.1 ; 45.6,38.02 45.6,38.72 45.61,38.72 ; 45.61,38.75 R8.1
  BOTTOM w0.508: v1(45.59,38.73) 42.9,38.73 41.88,39.75 36.58,39.75 TP20.1
VDDP: length 18.5
  TOP w0.203: U1.8 52.12,38.35 52.32,38.55 52.32,38.73
  TOP w0.508: TP19.1 57.33,45.09 54.38,42.14 54.38,41.66 53.58,40.86 C32.2 53.52,40.49 52.32,39.29 v1(52.32,39.22) 52.32,38.73
  BOTTOM w0.508: v1(44.2,39.42) 46.56,39.42 46.76,39.22 v1(52.32,39.22)
ACIN: length 14.3
  TOP w0.203: TP21.1 39.88,33.66 42.74,36.51 R9.1 42.77,36.66 ; U1.19 46.53,37.55 C38.2
  TOP w0.508: C38.2 R13.2 42.77,36.66
ACOK: length 32.6
  TOP w0.203: TP45.1 38.1,29.21 42.54,33.66 46.08,33.66 47.97,35.55 U1.24
  TOP w0.305: TP45.1 38.05,18.36 Q8.1 41.55,11.8 R36.2
ADP: length 6.1
  TOP w0.305: R4.1 21.65,51.37
  TOP w0.508: TP7.1 19.05,49.02 21.4,51.37 21.65,51.37
AMON/BMON: length 9.1
  TOP w0.203: R24.2 50.93,31.43 C45.2 52.96,29.4 52.96,25.78 TP36.1
ASGATE: length 33.2
  TOP w0.203: U1.13 49.76,40.07 v1(49.47,40.37) ; R5.2 v1(23.47,49.97)
  BOTTOM w0.203: v1(23.47,49.97) 23.37,49.87 23.37,48.64 29.97,42.04 46.48,42.04 48.08,40.44 49.4,40.44 v1(49.47,40.37)
B/I: length 3.8
  TOP w0.305: TP39.1 JP5.2
BATGONE: length 84.6
  TOP w0.305: R37.1 75.26,9.53 ; 75.26,9.53 77.67,11.94 81.43,11.94 84.15,9.22 R35.1 ; 75.26,9.53 65.02,9.53 60.41,4.91 47.6,4.91 ; 47.6,4.91 47.6,15.27 41.4,21.46 39.88,21.46 38.73,22.61 38.73,27.3 TP43.1 42.86,31.43 R21.1 ; 47.6,4.91 43.35,4.91 42.54,5.71 SW1.2
BGATE: length 33.1
  TOP w0.203: 51.43,34.8 51.36,34.87 U1.32
  TOP w0.305: v1(52.32,34.42) 51.82,34.42 51.43,34.8 ; 72.99,30.48 Q5.4 72.16,30.63 v1(72.01,30.48)
  TOP w0.508: 72.99,30.48 72.99,23.53 TP32.1 ; C42.2 71.75,30.23 v1(72.01,30.48)
  BOTTOM w0.508: v1(52.32,34.42) 52.96,33.78 64.77,33.78 66.04,32.51 66.04,31.5 67.44,30.1 71.63,30.1 v1(72.01,30.48)
BT1: length 17.2
  TOP w0.203: U1.12 50.16,40.03 50.29,40.16 ; v1(50.29,40.84) C30.1
  TOP w0.508: C30.1 50.29,40.16
  BOTTOM w0.305: TP15.1 45.92,48.9 47.98,46.84 47.98,43.15 v1(50.29,40.84)
BT2: length 16.3
  TOP w0.203: U1.4 53.38,36.75 54.18,37.54 54.18,37.92 54.82,38.56
  TOP w0.305: TP22.1 63.12,45.09 57.07,39.04 55.3,39.04
  TOP w0.508: C36.2 55.3,40.05 55.3,39.04 54.82,38.56
COMP: length 12.6
  TOP w0.203: TP37.1 51.41,25.37 51.41,29.43 C87.2 49.89,30.95 49.89,32.09 R27.1 49.15,32.97 49.76,33.59 U1.28
CSIN: length 24.8
  TOP w0.203: U1.14 49.36,39.66 48.58,40.45 C26.1
  TOP w0.305: 49.58,43.5 49.58,46.46 48.41,47.62 42.6,47.62 41.88,46.91 37.36,46.91 35.56,48.72 TP11.1 ; 49.58,43.5 49.58,43.17 R2.2 48.58,42.16 ; 49.58,43.5 C29.2
  TOP w0.508: C26.1 48.58,42.16
CSIN1: length 32.2
  TOP w0.203: R90.1 47.28,46.06 46.61,46.74 43.94,46.74 v1(43.56,46.35) ; v1(32.72,54.61) RS1.1
  BOTTOM w0.203: TP6.1 32.56,57.96 32.56,54.76 v1(32.72,54.61) 32.54,54.43 32.54,48.41 34.8,46.15 43.36,46.15 v1(43.56,46.35)
  vias: v1(33.71,55.91) v1(34.9,54.05) v1(34.92,56.64) v1(34.92,55.37) v1(35.9,54.47) v1(36.7,56.64) v1(36.7,55.37) v1(37.81,54.47) v1(38.73,55.37) v1(38.99,56.77) v1(39.71,54.47) v1(40.64,55.37) v1(41.27,56.64) v1(41.62,54.47) v1(42.54,55.37) v1(43.31,56.52) v1(43.52,54.47) v1(44.45,55.37) v1(45.34,56.52) v1(45.43,54.47) v1(48.13,55.63) v1(48.13,54.86) v1(48.13,53.98) v1(49.02,55.63) v1(49.02,54.86) v1(49.02,53.98)
CSIP: length 12.4
  TOP w0.203: U1.15 48.96,39.43 48.51,39.88 48.2,39.88 C26.2
  TOP w0.305: TP12.1 41.48,44.65 45,44.65 C28.2 45.83,43.76 R1.2 47.18,42.29
  TOP w0.508: C26.2 47.18,42.29
CSIP1: length 28.9
  TOP w0.203: R89.1 43.94,45.97 v1(43.56,45.59) ; v1(32.03,54.61) RS1.2
  BOTTOM w0.203: TP3.1 32.13,59.94 32.13,54.71 v1(32.03,54.61) 32.13,54.51 32.13,48.21 34.57,45.77 43.38,45.77 v1(43.56,45.59)
  vias: v1(25.53,54.86) v1(25.53,53.98) v1(25.53,53.09) v1(25.91,55.75) v1(26.16,54.86) v1(26.16,53.98) v1(26.16,53.09) v1(26.54,56.9) v1(27.43,57.02) v1(27.43,55.88) v1(27.81,54.86) v1(27.81,53.85) v1(28.7,54.53) v1(29.46,57.02) v1(29.59,56.01) v1(29.72,54.99) v1(29.79,54.15) v1(30.35,57.15) v1(30.86,55.75)
CSON: length 14.9
  TOP w0.203: U1.1 52.4,35.55 C37.1 ; 55,34.24 R14.2 55.82,33.53 56.01,33.53 57.78,31.75 TP30.1
  TOP w0.305: 53.73,34.24 C37.1
  TOP w0.508: C35.2 54.17,33.26 53.73,33.69 53.73,34.24 55,34.24
CSON1: length 22.3
  TOP w0.203: R92.1 59.53,34.72 60.14,34.72 60.96,33.91 65.66,33.91 70.28,38.53 71.5,38.53 ; 71.5,38.53 RS2.1 ; 71.5,38.53 72.82,38.53 74.93,40.64 TP29.1
CSOP: length 13.3
  TOP w0.203: C37.2 53.53,35.62 53.21,35.95 U1.2
  TOP w0.254: TP27.1 63.25,36.45 55.31,36.45
  TOP w0.508: C37.2 54.99,35.62 R10.2 55.31,35.94 C34.2
DCIN: length 17.5
  TOP w0.203: TP17.1 37.59,41.78 41.55,41.78 42.85,43.08 45.12,43.08 R7.1 ; 46.48,38.86 47,38.35 U1.17
  TOP w0.508: 46.48,38.86 46.48,40.01 45.91,40.58 C31.2 R7.1
ID: length 4.8
  TOP w0.305: TP38.1 R35.2 R43.2
LG1: length 15.5
  TOP w0.203: 52.63,40.64 52.63,40.44 51.36,39.17 U1.9
  TOP w0.305: 47.27,49.59 Q2.4
  TOP w0.508: TP16.1 52.65,45.09 ; 52.65,45.09 49.23,48.51 47.88,48.51 47.27,49.12 47.27,49.59 ; 52.65,45.09 52.65,40.67 52.63,40.64
LG2: length 27.6
  TOP w0.203: U1.7 52.55,37.95 v1(52.7,38.1)
  TOP w0.305: v1(69.47,52.45) 69.47,51.94 Q3.4
  BOTTOM w0.508: v1(69.47,52.45) 69.47,49.4 67.94,47.88 TP18.1 66.04,43.18 62.64,43.18 60.58,41.12 57.73,41.12 54.71,38.1 v1(52.7,38.1)
OTGEN/CMIN: length 47.2
  TOP w0.203: v1(46.81,37.01) 46.84,37.01 46.98,37.15 U1.20
  TOP w0.305: SW2.2 56.9,6.32 56.16,5.59 51.94,5.59 50.16,7.37 50.16,14.61 TP44.1
  BOTTOM w0.305: v1(46.81,37.01) 47.37,36.45 47.37,35.05 43.18,30.86 43.18,26.67 TP44.1
OTGPG/CMOUT: length 34.7
  TOP w0.203: U1.26 48.96,34.51 48.46,34.01 47.6,34.01 46.94,33.35 46.94,30.56 43.69,27.3 43.69,22.99 48.26,18.41 TP47.1
  TOP w0.305: TP47.1 52.15,18.34 Q10.1 52.15,14.91 54.03,13.03 54.91,13.03 56.15,11.8 R39.2
PH1: length 47
  TOP w0.203: U1.10 50.96,39.33 51.66,40.03 51.66,40.21
  TOP w0.305: v1(51.82,40.84) R6.1
  TOP w0.508: TP56.1 54.16,66.04 ; 54.16,66.04 54.16,71.07 52.2,73.03 TP14.1 ; 54.16,66.04 54.16,61.67 JP2.1 54.23,57.68 ; 51.66,40.21 51.82,40.36 R6.1
  BOTTOM w0.508: 48.89,49.38 48.89,48.87 51.82,45.95 v1(51.82,40.84)
  vias: v1(48.77,51.69) v1(48.77,50.93) v1(48.77,50.04) v1(49.53,51.69) v1(49.53,50.93) v1(49.53,50.04) v1(50.8,52.58) v1(51.18,55.12) v1(51.18,54.36) v1(51.18,53.59) v1(51.18,51.82) v1(51.18,50.8) v1(51.18,49.78) v1(52.07,57.02) v1(52.07,50.29) v1(52.32,55.5) v1(52.32,53.85) v1(52.32,51.94) v1(52.96,54.86) v1(52.96,52.83) v1(53.21,50.93) v1(53.21,49.78) v1(53.47,57.66) v1(53.47,56.64) v1(53.6,53.72) v1(53.72,55.5) v1(53.72,51.94) v1(54.36,50.93) v1(54.74,56.77) v1(54.74,55.12) v1(54.74,52.45) v1(54.81,49.48) v1(55.12,57.66) v1(55.5,53.72) v1(55.75,50.8) v1(55.88,56.39) v1(56.26,55.12) v1(56.26,52.32)
PH2: length 44.4
  TOP w0.203: U1.6 53.04,37.55 53.24,37.75 53.24,39.01
  TOP w0.508: 63.5,66.04 JP1.1 63.5,57.28 ; 63.5,66.04 TP57.1 ; 63.5,66.04 TP13.1 ; v1(55.31,41.45) 54.41,40.55 54.41,40.18 53.24,39.01
  BOTTOM w0.508: v1(55.31,41.45) 56.78,42.93 58.8,42.93 60.71,44.83 60.71,46.23 62.97,48.49 65.89,48.49 66.78,49.38
  vias: v1(60.83,55.12) v1(60.96,52.58) v1(60.96,50.67) v1(61.34,56.77) v1(61.47,53.72) v1(61.47,49.78) v1(62.23,57.79) v1(62.23,54.99) v1(62.23,50.67) v1(62.36,52.58) v1(62.74,49.78) v1(63.12,56.9) v1(63.25,53.72) v1(63.37,55.63) v1(63.37,51.82) v1(63.63,50.67) v1(64.01,54.61) v1(64.14,57.79) v1(64.14,52.83) v1(64.39,49.78) v1(64.77,56.77) v1(64.77,55.63) v1(64.77,53.72) v1(64.77,51.94) v1(65.02,50.67) v1(65.41,57.79) v1(65.53,49.78) v1(65.66,55.88) v1(65.66,52.45) v1(65.79,54.86) v1(66.04,57.02) v1(67.18,51.82) v1(67.18,51.05) v1(67.18,50.29) v1(67.69,51.44) v1(67.69,50.67)
PROCHOT#: length 39.2
  TOP w0.203: TP46.1 33.66,24.77 33.66,30.48 34.92,31.75 39.37,31.75 41.91,34.29 46.2,34.29 47.37,35.46 47.37,35.69 47.63,35.95 U1.23
  TOP w0.305: R38.2 29.15,13.54 Q9.1 27.38,17.86 TP46.1
PROG: length 13.2
  TOP w0.203: TP33.1 45.72,28.19 48.44,30.91 48.44,32.07 R23.1 47.68,32.94 48.31,33.58 48.62,33.58 49.36,34.33 U1.27
PSYS: length 15.1
  TOP w0.203: U1.30 50.56,34.46 R25.1 53.47,31.56 53.47,28.57 57.91,24.13 TP34.1
PULLUP: length 62.6
  TOP w0.152: 56.62,10.41 R39.1
  TOP w0.508: R16.2 R15.2 23.05,28 JP6.2 ; JP3.1 30.54,8.95 v1(30.54,11.43) ; R36.1 v1(43.43,10.4) 44.12,10.4 R28.1 ; R31.1 57.01,10.41 R39.1 57.01,10.4 57.02,10.41 56.62,10.41 56.62,10.41 v1(56.26,10.41)
  BOTTOM w0.508: v1(56.26,10.41) 55.85,10.41 55.85,10.4 v1(43.43,10.4) 31.57,10.4 v1(30.54,11.43) 30.54,21.48 23.83,28.19 JP6.2
PWRLED: length 28.4
  TOP w0.508: v1(32.96,11.43) 32.96,9.08 JP3.2
  BOTTOM w0.508: v1(32.96,11.43) 33.49,11.96 v1(44.16,11.96) v1(58.36,11.96)
SCL: length 104
  TOP w0.203: v1(46.61,35.56) 46.74,35.56 47.52,36.35 U1.22 ; v1(21.59,3.87) 21.06,4.41 21.06,14.71 31.5,25.15 31.5,26.1 v1(32,26.61)
  BOTTOM w0.203: v1(21.59,3.87) 21.21,3.49 21.21,2.67 22.23,1.65 55.63,1.65 61.98,8 65.99,8 v1(66.4,8.41) ; TP26.1 35.56,28.7 33.46,26.61 v1(32,26.61) 32,29.24 33.83,31.06 37.69,31.06 42.44,35.81 46.35,35.81 v1(46.61,35.56)
SCL1: length 3.1
  TOP w0.305: TP42.1 R41.2
SDA: length 111.9
  TOP w0.203: v1(30.48,26.61) 30.99,26.1 30.99,25.27 20.45,14.73 20.45,4.25 v1(20.07,3.87) ; U1.21 47.29,36.75 46.86,36.32 v1(46.61,36.32)
  BOTTOM w0.203: v1(70.82,8.39) 69.91,7.49 62.1,7.49 55.88,1.27 21.97,1.27 20.57,2.67 20.57,3.37 v1(20.07,3.87) ; v1(46.61,36.32) 46.48,36.2 42.24,36.2 37.54,31.5 33.6,31.5 31.29,29.18 31.29,27.43 30.48,26.62 v1(30.48,26.61) 30.48,26.04 32.38,24.13 TP24.1
SDA1: length 3.1
  TOP w0.305: TP41.1 R40.2
TS: length 4.8
  TOP w0.305: R42.2 R37.2 TP40.1
UG1: length 34.5
  TOP w0.203: U1.11 50.56,39.59 50.98,40.01 v1(50.98,40.11)
  TOP w0.305: v1(50.32,56.44) Q1.4
  BOTTOM w0.508: TP9.1 JP2.2 51.69,58.85 50.32,57.48 v1(50.32,56.44) 50.32,54.26 47.62,51.56 47.62,48.95 50.98,45.59 v1(50.98,40.11)
UG2: length 40.9
  TOP w0.203: v1(54.05,38.84) 53.72,38.51 53.72,37.72 53.15,37.15 U1.5
  TOP w0.305: v1(66.93,53.59) 66.58,53.95 Q4.4
  BOTTOM w0.508: v1(54.05,38.84) 57.18,41.96 59.11,41.96 61.47,44.32 61.47,45.85 63.14,47.52 66.07,47.52 68.45,49.91 68.45,52.07 v1(66.93,53.59) 66.93,58.8 66.04,59.69 JP1.2 TP10.1
VADP: length 31.9
  TOP w0.508: D1.1 v1(39.18,37.21) 39.69,36.7 R9.2
  BOTTOM w0.508: v1(20.57,53.09) 20.57,48.64 32.66,36.55 38.52,36.55 v1(39.18,37.21)
  vias: v1(2.16,61.59) v1(2.29,62.48) v1(2.29,60.71) v1(2.54,63.25) v1(2.54,59.82) v1(2.92,64.01) v1(3.05,58.93) v1(3.43,64.77) v1(3.56,58.29) v1(4.06,65.41) v1(4.19,57.79) v1(4.7,65.79) v1(4.83,57.4) v1(5.46,66.17) v1(5.46,57.15) v1(6.22,56.9) v1(6.35,66.29) v1(7.11,56.77) v1(7.24,66.42) v1(7.87,56.9) v1(8,66.29) v1(8.64,57.15) v1(8.76,66.04) v1(8.76,54.99) v1(9.27,57.53) v1(9.4,65.79) v1(9.91,57.91) v1(10.03,65.28) v1(10.54,58.55) v1(10.67,64.64) v1(11.05,64.01) v1(11.05,59.18) v1(11.43,63.37) v1(11.43,59.94) v1(11.43,56.01) v1(11.68,62.61) v1(11.68,60.83) v1(11.81,61.72) v1(12.32,65.91) v1(13.46,60.96) v1(13.59,63.37) v1(13.59,58.93) v1(14.1,54.23) v1(14.99,55.5) v1(15.11,65.79) v1(15.88,59.31) v1(16,54.1) v1(16.38,62.99) v1(17.02,56.9) v1(18.29,54.86) v1(18.29,53.98) v1(18.29,53.09) v1(18.8,58.29) v1(19.94,54.74) v1(19.94,53.85) v1(19.94,53.09) v1(20.57,54.74) v1(20.57,53.85)
VSYS: length 83.5
  TOP w0.203: R91.1 59.5,35.31 60.2,35.31 61.21,34.29 65.41,34.29 70.03,38.91 71.5,38.91 ; TP23.1 76.83,43.18 72.57,38.91 71.5,38.91 ; 71.5,38.91 v1(71.5,40.18)
  TOP w0.508: D1.2 v1(41.78,38.43)
  BOTTOM w0.305: v1(59.37,38.61) 59.63,38.86 66.17,38.86 TP58.1 68.45,41.15 68.45,42.93 70.99,45.47 70.99,52.7
  BOTTOM w0.508: v1(41.78,38.43) 42.88,37.34 45.57,37.34 46.71,38.48 51.28,38.48 53.34,36.42 59.92,36.42 61.59,38.1 68.2,38.1 69.8,39.7 69.8,42.75 70.26,43.21
  vias: v1(67.94,55.88) v1(67.94,55.12) v1(67.94,54.23) v1(68.71,55.88) v1(68.71,55.12) v1(68.71,54.23) v1(70.48,55.88) v1(70.48,54.1) v1(70.51,43.76) v1(70.48,42.01) v1(70.51,40.21) v1(70.99,54.99) v1(70.99,42.93) v1(70.99,41.27) v1(71.5,55.75) v1(71.5,43.94) v1(71.5,42.04) v1(72.01,41.27) v1(72.14,42.93) v1(72.52,56.26) v1(72.52,40.21) v1(72.59,41.99) v1(72.9,43.94) v1(73.28,58.42) v1(74.17,56.26) v1(74.68,58.67) v1(75.56,55.75) v1(76.07,57.02) v1(76.2,58.55) v1(77.01,69.85) v1(77.01,67.94) v1(77.01,66.04) v1(77.01,64.13) v1(77.01,62.23) v1(76.96,60.2) v1(77.19,57.91) v1(77.47,55.88) v1(78.11,64.9) v1(78.11,62.23) v1(78.23,66.93) v1(78.23,58.67) v1(78.23,57.02) v1(78.36,69.09) v1(79.38,55.88) v1(79.5,61.72) v1(79.76,67.82) v1(79.76,64.64) v1(80.14,70.49) v1(80.26,58.29) v1(80.52,66.04) v1(81.28,55.88) v1(81.91,57.15) v1(82.01,58.67) v1(82.3,62.36) v1(82.55,59.82) v1(82.68,67.31) v1(82.8,57.79) v1(83.19,64.64) v1(83.19,55.88) v1(83.95,69.22) v1(83.95,57.15) v1(84.05,58.67) v1(84.96,61.09) v1(85.09,55.88) v1(86.23,58.04) v1(86.61,68.33) v1(86.99,55.88) v1(87.6,58.67) v1(87.63,57.02) v1(88.52,59.69) v1(88.65,57.91) v1(88.9,55.88) v1(89.28,69.72) v1(89.41,67.44) v1(89.66,63.12) v1(89.66,58.67) v1(89.66,57.02) v1(90.8,55.88) v1(90.93,67.44) v1(90.93,62.36) v1(91.69,58.17) v1(92.38,65.04) v1(92.5,65.93) v1(92.5,64.15) v1(92.71,55.88) v1(92.76,66.69) v1(92.76,63.26) v1(93.09,59.56) v1(93.14,67.45) v1(93.27,62.37) v1(93.34,58.55) v1(93.34,57.15) v1(93.65,68.22) v1(93.77,61.74) v1(94.28,68.85) v1(94.41,61.23) v1(94.36,57.91) v1(94.61,55.8) v1(94.92,69.23) v1(95.04,60.85) v1(95.38,58.55) v1(95.38,57.15) v1(95.68,69.61) v1(95.68,60.6) v1(96.44,60.34) v1(96.52,55.8) v1(96.57,69.74) v1(97.33,60.21) v1(97.41,56.77) v1(97.46,69.87) v1(98.09,60.34) v1(98.04,58.04) v1(98.22,69.74) v1(98.42,55.88) v1(98.85,60.6) v1(98.98,69.49) v1(99.49,60.98) v1(99.44,56.9) v1(99.62,69.23) v1(100.12,61.36) v1(100.25,68.72) v1(100.33,55.8) v1(100.46,58.04) v1(100.76,61.99) v1(100.89,68.09) v1(101.09,56.77) v1(101.27,67.45) v1(101.27,62.63) v1(101.65,66.82) v1(101.65,63.39) v1(101.9,66.06) v1(101.9,64.28) v1(101.98,58.04) v1(102.03,65.17) v1(102.23,55.8) v1(102.62,57.02)
VSYS1: length 14.9
  TOP w0.152: 57.98,38.61 R12.2
  TOP w0.203: U1.3 53.69,36.35 54.61,37.26 54.61,37.77 54.81,37.97 57.98,37.97
  TOP w0.254: TP25.1 62.61,39.75 59.12,39.75 57.98,38.61
  TOP w0.508: C39.2 57.98,38.61
N3388611: length 7
  BOTTOM w0.508: R87.2 12.57,11.62 12.57,14.22 13.46,15.11 C85.2 R88.1
N3403853: length 2.1
  BOTTOM w0.305: U2.29 21.32,5.54 R86.2
N3403912: length 2.2
  BOTTOM w0.305: U2.30 20.52,5.72 R85.2
N3404418: length 17.4
  TOP w0.508: v1(16.18,13.59) 15.6,14.17 J10.1
  BOTTOM w0.305: 17.39,13.59 U2.7
  BOTTOM w0.508: U2.7 U2.8 ; J10.1 10.67,15.7 R84.2 ; 17.39,13.59 v1(16.18,13.59) 15.07,13.59 C86.2
N3404574: length 10.1
  TOP w0.254: J10.2 9.74,13.37
  TOP w0.305: v1(16.26,11.96) 11.16,11.96 9.74,13.37
  BOTTOM w0.305: U2.5 v1(16.26,11.96)
N3404616: length 10.9
  BOTTOM w0.305: J10.3 9.91,12.57 12.95,9.53 16.03,9.53 16.23,9.73 16.23,10.9 16.49,11.16 U2.4
N3405190: length 4.2
  BOTTOM w0.305: U2.6 15.74,12.76 C84.2 R87.1
N3405391: length 4.1
  BOTTOM w0.508: U2.9 17.93,15.86 17.27,16.51 R88.2
N3864784: length 1.5
  BOTTOM w0.305: U3.7 12.25,20.45 R81.2
N3864951: length 1.7
  BOTTOM w0.305: C82.2 13.65,19.94 U3.6
N3865052: length 4.1
  BOTTOM w0.305: U3.3 16.76,20.96 17.34,20.38 R82.1 18.03,18.35 R83.2
N3866091: length 5.4
  BOTTOM w0.305: U3.10 13.64,21.72 ; 13.64,21.72 13.45,21.91 ; 13.64,21.72 U3.9
  BOTTOM w0.508: C81.2 11.87,22.8 12.19,22.48 R81.1 ; R81.1 R84.1 ; R81.1 13.45,21.91
N3880625: length 1.3
  TOP w0.508: R27.2 C46.2
N3884094: length 2.4
  TOP w0.203: U1.29 50.16,34.29 50.67,33.78 R24.1
N3892370: length 15.1
  TOP w0.152: 24.12,51.38 R5.1 ; 25.53,51.37 C25.2
  TOP w0.305: R5.1 25.53,51.37 ; 24.12,51.38 v1(24.12,52.25) Q7.4 ; Q6.4 v1(22.04,55.58)
  BOTTOM w0.305: v1(24.12,52.25) 22.04,54.33 v1(22.04,55.58) 22.04,58.87 TP8.1
N3892442: length 32.4
  TOP w0.203: v1(47.24,40.01) 47.88,39.37 48.36,39.37 48.56,39.17 U1.16 ; R4.2 v1(22.78,49.97)
  BOTTOM w0.203: v1(22.78,49.97) 22.86,49.9 22.86,48.51 29.74,41.63 46.25,41.63 47.24,40.64 v1(47.24,40.01)
N3896354: length 5.2
  TOP w0.203: 46.11,32.83 46.11,33.11 47.52,34.52 48.34,34.52 48.56,34.75 U1.25
  TOP w0.305: 46.11,32.83 C43.2
  TOP w0.508: R21.2 46.11,32.83
N3896496: length 5
  TOP w0.508: D1.3 42.6,40.82 44.07,42.29 R7.2
N3899462: length 2.5
  TOP w0.305: R34.1 59.75,12.76 60.01,13.02 LED3.2
N3902274: length 3.3
  TOP w0.305: LED1.2 35.24,12.97 34.35,12.08 R32.1
N3902278: length 2.3
  TOP w0.305: Q9.3 LED1.1
N3906567: length 2.6
  TOP w0.305: SW1.1 R44.1
N3906607: length 2.8
  TOP w0.305: R28.2 45.55,9.99 45.08,9.53 SW1.3
N3907387: length 2.6
  TOP w0.305: SW2.1 R45.1
N3907453: length 2.7
  TOP w0.305: SW2.3 59.44,9.65 59.75,9.97 R31.2
N3914358: length 2.5
  TOP w0.305: R33.1 45.55,14 LED2.2
N3914362: length 2.3
  TOP w0.305: LED2.1 Q8.3
N3952115: length 1.4
  TOP w0.508: C36.1 R11.2
N3981607: length 2.4
  TOP w0.762: C27.2 R3.2
N4021953: length 1.5
  TOP w0.508: R6.2 C30.2
N4039122: length 2.3
  TOP w0.305: Q10.3 LED3.1
N4125007: length 2.7
  TOP w0.508: R89.2 45.99,45.45 47.24,44.2 R1.1
N4125862: length 1.3
  TOP w0.152: 57.67,35.69 R91.2
  TOP w0.508: R10.1 57.67,35.69
N4125866: length 1.2
  TOP w0.508: R14.1 R92.2
N38675681: length 2.3
  TOP w0.203: 48.68,43.84 R2.1
  TOP w0.508: R90.2 48.68,43.84

## Copper pours and planes (outline as drawn; the poured copper is in the pictures)
GND on TOP: 70.23,51.56 70.1,51.44 68.96,51.44 68.96,47.88 70.48,46.35 77.6,46.35 85.72,38.23 101.22,38.23 103.2,40.21 103.2,54.15 102.74,54.61 72.14,54.61 70.23,52.7
GND on TOP: 87.71,7.19 101.17,7.19 103.3,9.32 103.3,19.46 101.17,21.59 71.88,21.59 70.38,23.09 70.38,34.11 69.9,34.59 67.18,34.59 66.29,33.71 66.29,14.91 68.5,12.7 82.19,12.7
GND on TOP: 3.45,34.54 0.63,37.36 0.63,44.78 3.1,47.24 15.49,47.24 17.65,45.09 20.96,45.09 26.67,50.8 26.67,51.69 27.18,51.69 28.19,52.7 28.19,53.09 46.74,53.09 47.73,52.1 47.73,50.29 34.42,50.29 32.77,48.64 32.77,44.45 22.86,34.54
GND on TOP: 5.46,17.07 2.62,17.07 2.59,17.04 2.59,15.65 3.51,15.65 3.51,9.42 2.59,9.42 2.59,8 2.62,7.98 5.46,7.98 5.49,8 5.49,17.04
GND on TOP, BOTTOM: 72.64,70.49 72.64,62.1 73.28,61.47 75.69,61.47 75.95,61.72 75.95,70.61 75.44,71.12 73.28,71.12
GND on BOTTOM: 69.98,49.15 69.6,48.77 69.6,47.75 69.98,47.37 70.23,47.37 70.48,47.62 70.48,51.44 70.36,51.56 70.1,51.56 69.98,51.44
GND on BOTTOM: 27.43,52.7 27.43,50.42 28.12,49.73 30.75,49.73 31.79,50.77 31.79,52.86 31.51,53.14 27.86,53.14
GND on BOTTOM: 87.68,7.19 101.17,7.19 103.3,9.32 103.3,19.51 101.22,21.59 71.88,21.59 70.36,23.11 70.36,28.19 69.85,28.7 66.8,28.7 66.17,28.07 66.17,15.11 68.58,12.7 82.17,12.7
GND on BOTTOM: 12.95,24 12.95,23.24 13.46,23.24 14.22,22.48 14.22,19.96 14.27,19.96 14.72,19.52 14.72,17.92 14.71,17.91 16.97,17.91 16.97,18.69 16.64,19.02 16.64,20.6 15.72,20.6 15.72,21.84 15.11,21.84 15.11,24
GND on BOTTOM: 48.26,37.59 48.26,36.07 48.89,35.43 50.67,35.43 51.31,36.07 51.31,37.47 50.8,37.97 48.64,37.97
GND on BOTTOM: 1.02,45.16 1.02,36.98 3.35,34.65 16,34.65 20.8,39.45 20.8,41.73 15.62,46.91 2.77,46.91
GND on BOTTOM: 84.91,38.28 101.27,38.28 103.2,40.21 103.2,54.15 102.74,54.61 75.95,54.61 75.18,53.85 75.18,48.01
GND on BOTTOM: 2.64,8.13 5.51,8.13 5.51,17.17 2.64,17.17 2.59,17.12 2.59,8.18
GND on BOTTOM: 46.63,50.5 46.9,50.76 46.9,52.79 46.53,53.16 33.43,53.16 32.97,52.7 32.97,50.88 33.35,50.5
GND on L2: 7.11,1.02 7.11,6.99 0.76,6.99 0.76,70.87 6.98,70.87 6.98,76.84 97.03,76.84 97.03,71.5 103.25,71.5 103.25,6.86 97.66,6.86 97.66,1.02
GND on L3: 7.11,1.02 7.11,6.92 0.76,6.92 0.76,70.87 6.98,70.87 6.98,76.84 97.03,76.84 97.03,71.37 102.87,71.37 102.87,6.86 97.66,6.86 97.66,1.02
VBAT on TOP (solid shape): 75.87,30.43 74.12,30.43 74.12,32.82 75.87,32.82
VBAT on TOP: 74.04,32.77 74.04,27.69 79.38,22.35 100.36,22.35 103.33,25.32 103.33,33.55 101.42,35.46 86.97,35.46 86.94,35.43 76.99,35.43 74.57,33.02 74.3,33.02
VBAT on BOTTOM: 100.36,22.35 103.33,25.32 103.33,33.55 101.42,35.46 76.99,35.46 74.04,32.51 74.04,27.69 79.38,22.35
ADP on TOP: 21.46,50.98 21.46,54.56 22.73,54.56 22.73,56.01 21.46,56.01 21.46,59.69 24.89,59.69 24.89,55.75 24.77,55.63 24.77,53.47 23.14,53.47 23.14,50.98
CSIN1 on TOP (solid shape): 49.38,53.12 48.87,53.12 48.87,53.71 47.09,53.71 47.09,54.09 47.6,54.09 47.6,54.37 47.09,54.37 47.09,54.72 47.6,54.72 47.6,55.03 47.09,55.03 47.09,55.38 47.6,55.38 47.6,55.66 47.09,55.66 47.09,56.04 48.87,56.04 48.87,56.63 49.38,56.63
CSIN1 on TOP: 46.84,53.47 47.24,53.06 49.48,53.06 49.48,56.64 48.64,57.48 34.37,57.48 32.97,56.08 32.97,53.95 33.45,53.47
CSIN1 on BOTTOM: 48.89,53.47 49.48,54.05 49.48,56.64 48.64,57.48 34.37,57.48 33.27,56.39 33.27,54.23 34.04,53.47
CSIP1 on TOP (solid shape): 27,52.78 25.25,52.78 25.25,55.17 27,55.17
CSIP1 on TOP: 25.15,59.69 25.15,52.73 27.33,52.73 28.33,53.73 31.48,53.73 31.75,54 31.75,58.93 30.99,59.69
CSIP1 on BOTTOM: 25.02,56.9 25.02,52.96 25.25,52.73 26.82,52.73 27.58,53.49 31.06,53.49 31.52,53.95 31.52,56.52 30.56,57.48 25.6,57.48
CSON1 on TOP: 70.28,34.79 70.28,37.39 70.74,37.85 72.39,37.85 72.77,37.47 72.77,34.07 73.53,33.31 73.53,31.12 70.64,31.12 70.64,34.43
PH1 on TOP (solid shape): 48.72,51.96 50.5,51.96 50.5,51.57 49.99,51.57 49.99,51.3 50.5,51.3 50.5,50.94 49.99,50.94 49.99,50.63 50.5,50.63 50.5,50.28 49.99,50.28 49.99,50 50.5,50 50.5,49.62 48.72,49.62 48.72,49.03 48.21,49.03 48.21,52.54 48.72,52.54
PH1 on TOP: 48.18,49 48.18,52.6 49.81,52.6 49.81,55.47 51,55.47 51.31,55.78 51.31,57.53 51.97,58.19 56.03,58.19 56.59,57.63 56.59,50.27 55.32,49
PH1 on BOTTOM: 48.25,49.4 48.25,51.55 50.93,54.23 50.93,57.09 52.03,58.19 56.1,58.19 56.65,57.63 56.65,50.27 55.38,49 48.65,49
PH2 on TOP (solid shape): 68.56,49.19 68.05,49.19 68.05,49.77 66.27,49.77 66.27,50.15 66.78,50.15 66.78,50.43 66.27,50.43 66.27,50.79 66.78,50.79 66.78,51.09 66.27,51.09 66.27,51.45 66.78,51.45 66.78,51.73 66.27,51.73 66.27,52.11 68.05,52.11 68.05,52.69 68.56,52.69
PH2 on TOP: 60.38,50.42 60.38,57.79 60.93,58.34 65.99,58.34 67.06,57.28 67.06,54.43 65.99,54.43 65.84,54.28 65.84,53.16 66.24,52.76 68.63,52.76 68.63,49.15 61.65,49.15
PH2 on BOTTOM: 60.39,50.38 60.39,57.76 60.97,58.34 65.99,58.34 66.37,57.96 66.37,53.39 67.94,51.82 67.94,50.16 66.9,49.12 61.65,49.12
VADP on TOP (solid shape): 20.91,52.78 19.15,52.78 19.15,55.17 20.91,55.17
VADP on TOP: 0.76,58.06 0.76,64.69 4.19,68.12 17.35,68.12 21.21,64.26 21.21,56.01 20.96,55.75 20.96,52.7 6.12,52.7
VADP on BOTTOM: 0.63,58.19 0.63,64.57 4.19,68.12 17.32,68.12 21.34,64.11 21.34,53.47 20.57,52.7 6.12,52.7
VSYS on TOP (solid shape): 68.02,56.15 69.8,56.15 69.8,55.77 69.29,55.77 69.29,55.49 69.8,55.49 69.8,55.13 69.29,55.13 69.29,54.83 69.8,54.83 69.8,54.47 69.29,54.47 69.29,54.19 69.8,54.19 69.8,53.81 68.02,53.81 68.02,53.23 67.52,53.23 67.52,56.73 68.02,56.73
VSYS on TOP: 72.01,54.99 102.74,54.99 103.15,55.39 103.15,69 100.69,71.45 77.17,71.45 76.45,70.74 76.45,61.72 75.56,60.83 72.01,60.83 70.99,59.82 68.96,59.82 67.56,58.42 67.56,53.21 70.23,53.21
VSYS on TOP: 72.42,39.5 73.2,40.28 73.2,44.04 72.85,44.4 70.59,44.4 70.26,44.07 70.26,40.11 70.87,39.5
VSYS on BOTTOM: 71.5,45.44 71.5,51.82 70.36,52.96 68.53,52.96 67.54,53.95 67.54,58.39 68.96,59.82 70.99,59.82 72.01,60.83 75.56,60.83 76.45,61.72 76.45,70.61 77.34,71.5 100.58,71.5 103.1,68.99 103.1,55.35 102.74,54.99 75.95,54.99 74.68,53.72 74.68,43 73.71,42.04 73.71,40.69 72.77,39.75 70.61,39.75 70.26,40.11 70.26,44.2
N3865034 on BOTTOM: 16.03,21.34 16.03,22.5 15.49,23.04 15.49,26.67 17.91,29.08 20.19,29.08 20.19,27.43 18.8,27.43 17.91,26.54 17.91,23.75 18.41,23.24 18.41,21.34

## Text on the board
BOTTOM: SolderSide - Bottom
TOP: Component Side - TOP
